# EAGLE board debug_backplane (EAGLE 8.2.2), part 1 of 4
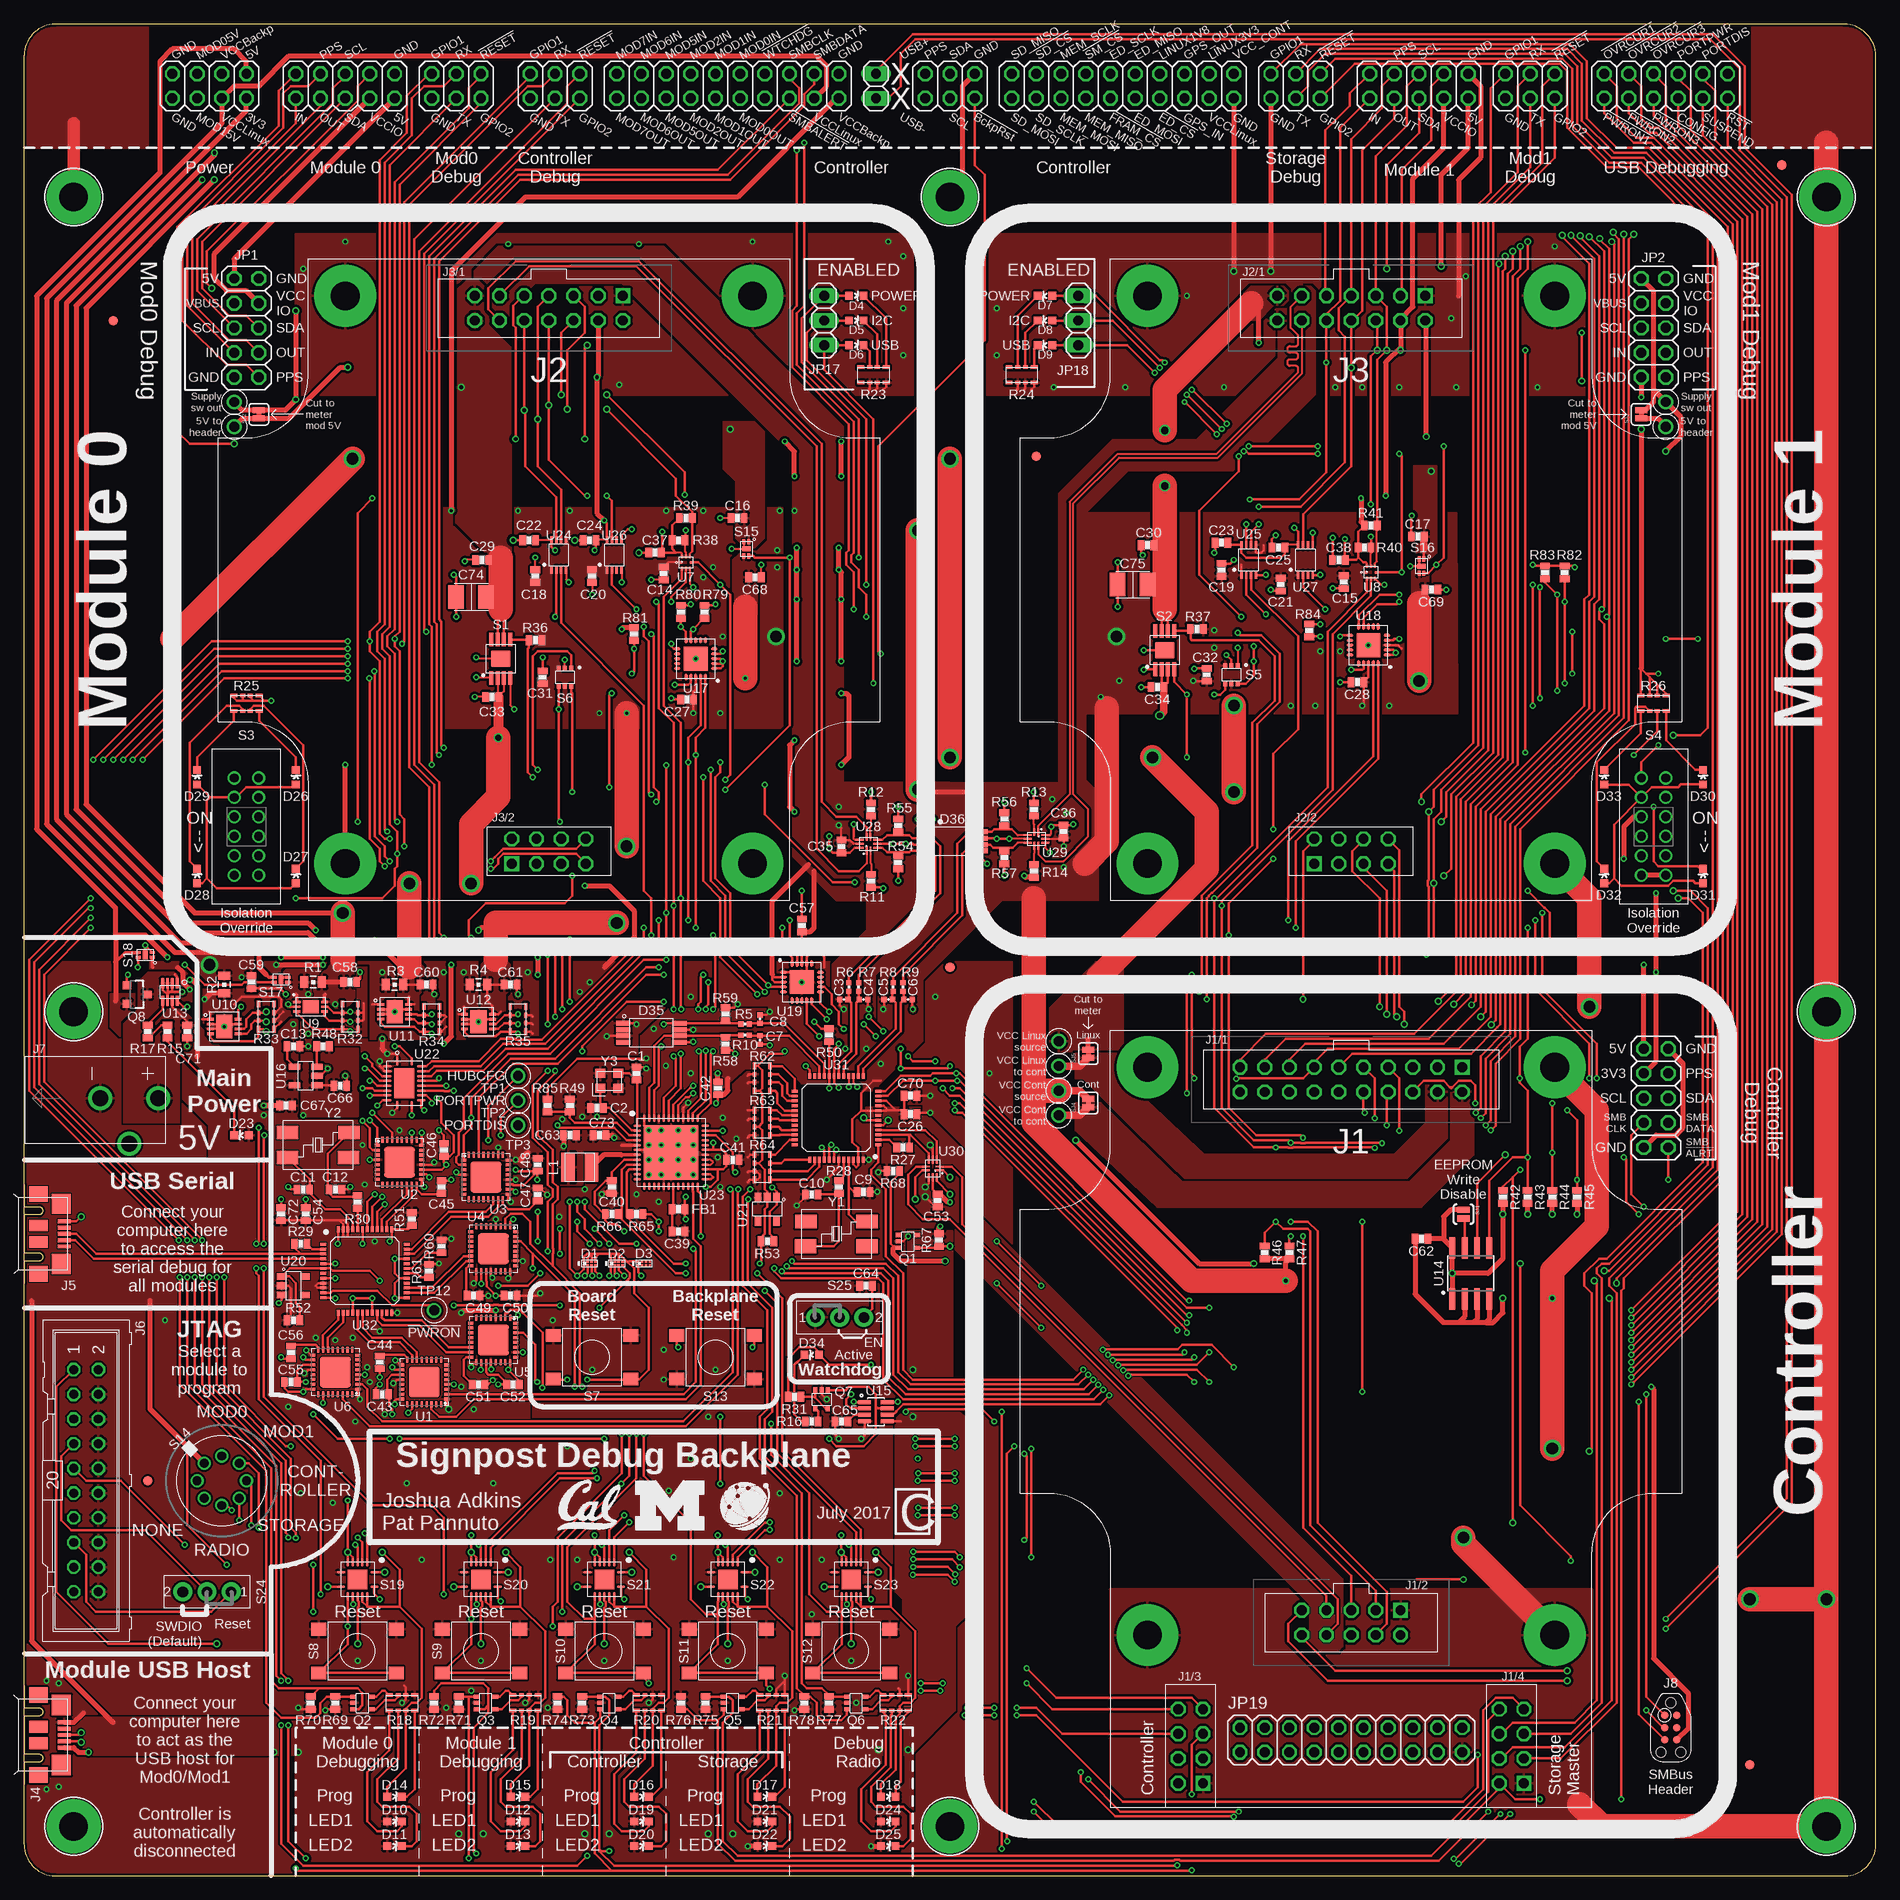
[diagram p0: board, top side]
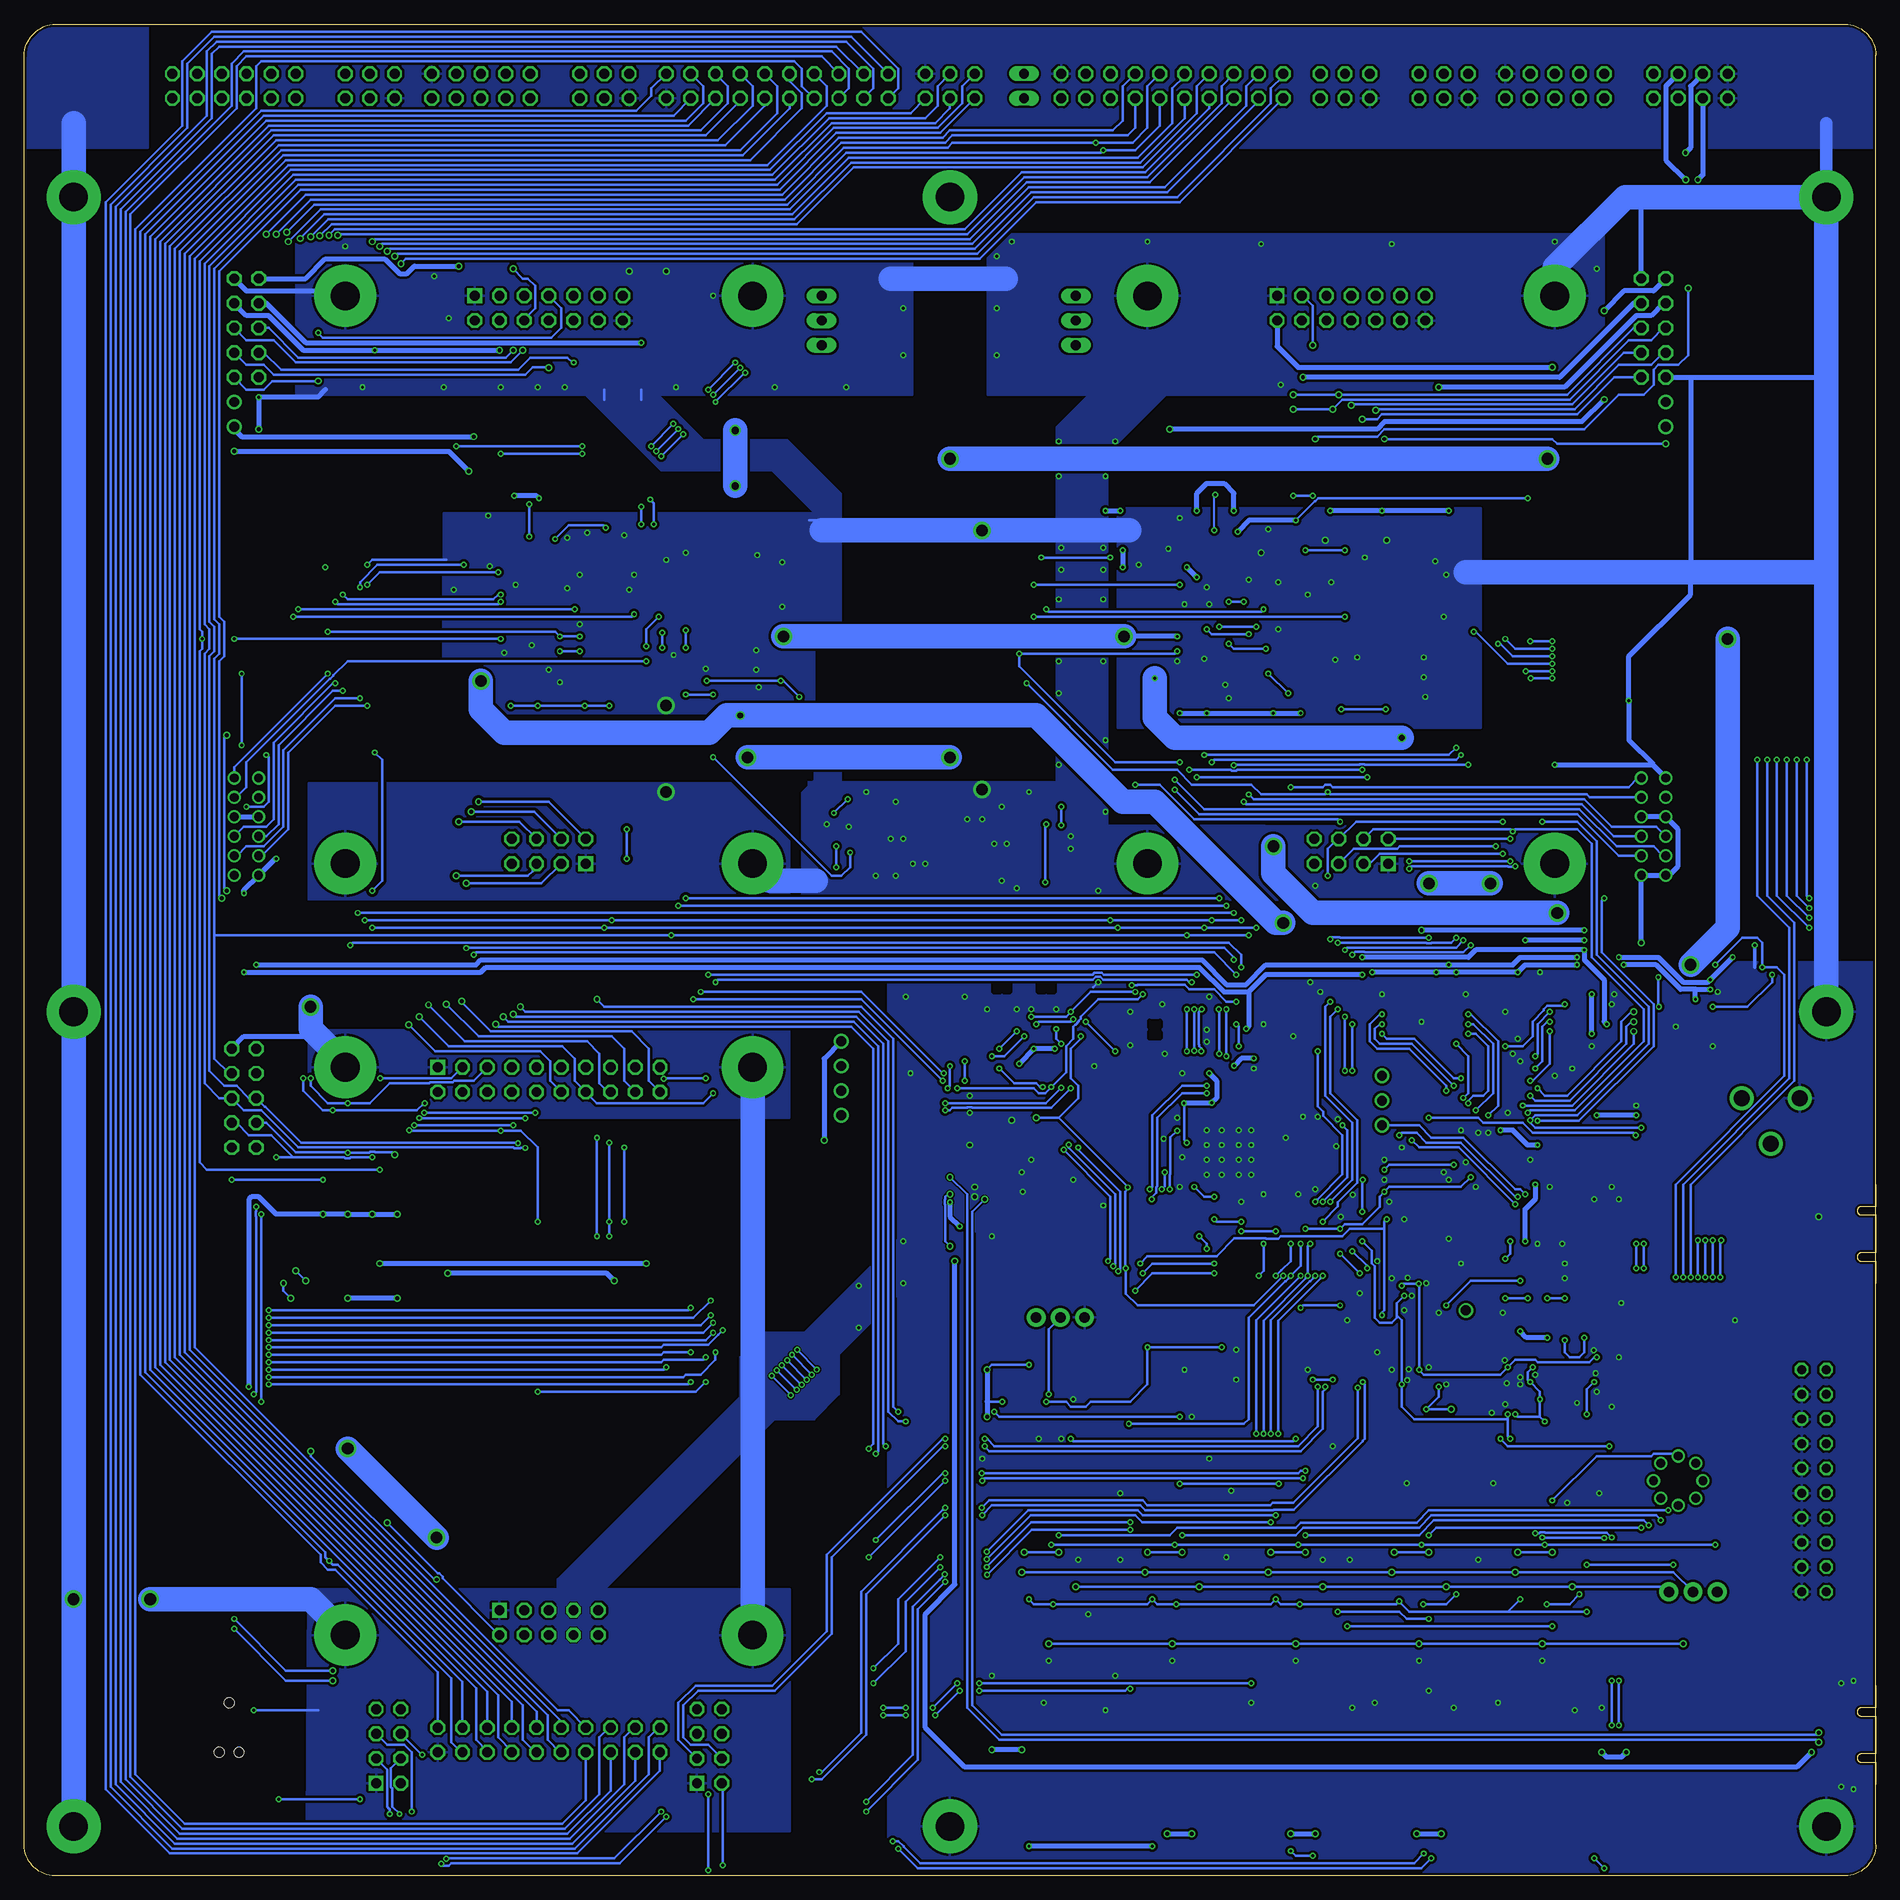
[diagram p1: board, bottom side, seen from below]

Size 190.5 x 190.5 mm. Coordinates in mm from the lower left corner, seen from the top.
Outline: 0,3.17 arc90 3.17,0 187.32,0 arc90 190.5,3.17 190.5,187.26 arc90 187.26,190.5 3.17,190.5 arc90 0,187.32 0,3.24
Copper layers (1*16): Top 0.035mm / dielectric 1.5mm / Bottom 0.035mm
Design rules "MF_Standard_2_Layer *": minimum track width 5mil, minimum drill 12mil, track to track 5mil, track to pad 5mil, pad to pad 5mil, via to via 5mil, smd to smd 0mil, copper to edge 10mil, drill to drill 10mil, minimum pad ring 6mil, minimum via ring 6mil, stop-mask expansion 2mil, vias tented up to drill 25mil, thermal gap 10mil
tRestrict: area 87.7,78.9 to 88,79; area 85.5,73.5 to 85.6,73.8; area 33,66.3 to 33.1,66.8

## Footprints (pad centres in the part's own frame; a part is rotated, then mirrored left to right if it is on the bottom)
0603_CAP = smd 0.7 x 1: 1 -0.65,0; 2 0.65,0
0402_CAP = smd 0.536 x 0.546: 1 -0.433,0; 2 0.433,0
1210_CAP = smd 2.4 x 1.6: 1 0,1.55; 2 0,-1.55
HMD8 = smd 0.25 x 0.3: 1A -0.6,-0.25; 1K -0.6,0.25; 2A -0.2,-0.25; 2K -0.2,0.25; 3A 0.2,-0.25; 3K 0.2,0.25; 4A 0.6,-0.25; 4K 0.6,0.25
LED-0603 = smd 0.8 x 0.8: A 0,-0.75; C 0,0.75
TSSOP-8 = smd 1.5 x 0.45: 1 -2.9,0.975; 2 -2.9,0.325; 3 -2.9,-0.325; 4 -2.9,-0.975; 5 2.9,-0.975; 6 2.9,-0.325; 7 2.9,0.325; 8 2.9,0.975
#4-PAD = drill 2.946 pad 5.563: B#4 0,0
BACKPLANE_MODULE_20PIN_10PIN_DEBUG = drill 1.016 square: 1 11.43,29.21; 21 5.08,-26.67; 100 -15.24,-44.45; 200 17.78,-44.45 | drill 1.016 octagon: 2 11.43,26.67; 3 8.89,29.21; 4 8.89,26.67; 5 6.35,29.21; 6 6.35,26.67; 7 3.81,29.21; 8 3.81,26.67; 9 1.27,29.21; 10 1.27,26.67; 11 -1.27,29.21; 12 -1.27,26.67; 13 -3.81,29.21; 14 -3.81,26.67; 15 -6.35,29.21; 16 -6.35,26.67; 17 -8.89,29.21; 18 -8.89,26.67; 19 -11.43,29.21; 20 -11.43,26.67; 22 5.08,-29.21; 23 2.54,-26.67; 24 2.54,-29.21; 25 0,-26.67; 26 0,-29.21; 27 -2.54,-26.67; 28 -2.54,-29.21; 29 -5.08,-26.67; 30 -5.08,-29.21; 101 -17.78,-44.45; 102 -15.24,-41.91; 103 -17.78,-41.91; 104 -15.24,-39.37; 105 -17.78,-39.37; 106 -15.24,-36.83; 107 -17.78,-36.83; 201 15.24,-44.45; 202 17.78,-41.91; 203 15.24,-41.91; 204 17.78,-39.37; 205 15.24,-39.37; 206 17.78,-36.83; 207 15.24,-36.83 | drill 2.946 pad 6.35: MNT1 -20.955,29.21; MNT2 20.955,29.21; MNT3 -20.955,-29.21; MNT4 20.955,-29.21
BACKPLANE_MODULE_14PIN_8PIN = drill 1.016 square: 1 7.62,29.21; 15 -3.81,-29.21 | drill 1.016 octagon: 2 7.62,26.67; 3 5.08,29.21; 4 5.08,26.67; 5 2.54,29.21; 6 2.54,26.67; 7 0,29.21; 8 0,26.67; 9 -2.54,29.21; 10 -2.54,26.67; 11 -5.08,29.21; 12 -5.08,26.67; 13 -7.62,29.21; 14 -7.62,26.67; 16 -3.81,-26.67; 17 -1.27,-29.21; 18 -1.27,-26.67; 19 1.27,-29.21; 20 1.27,-26.67; 21 3.81,-29.21; 22 3.81,-26.67 | drill 2.946 pad 6.35: MNT1 -20.955,29.21; MNT2 20.955,29.21; MNT3 20.955,-29.21; MNT4 -20.955,-29.21
USB_MICRO_B-HIROSE-ZX62R-B-5P = smd 0.4 x 1.35: 1 1.3,4.125; 2 0.65,4.125; 3 0,4.125; 4 -0.65,4.125; 5 -1.3,4.125 | smd 2.1 x 2: P$1 3.1,3.8; P$2 -3.1,3.8 | smd 1.6 x 1.9: P$3 -4.1,1.45; P$6 4.1,1.45 | smd 1.2 x 1.9: P$4 -0.85,1.45; P$5 0.85,1.45
ML20 = drill 0.914 octagon: 1 -11.43,-1.27; 2 -11.43,1.27; 3 -8.89,-1.27; 4 -8.89,1.27; 5 -6.35,-1.27; 6 -6.35,1.27; 7 -3.81,-1.27; 8 -3.81,1.27; 9 -1.27,-1.27; 10 -1.27,1.27; 11 1.27,-1.27; 12 1.27,1.27; 13 3.81,-1.27; 14 3.81,1.27; 15 6.35,-1.27; 16 6.35,1.27; 17 8.89,-1.27; 18 8.89,1.27; 19 11.43,-1.27; 20 11.43,1.27
PJ-102AH = drill 1.65: 1 0,-3; 2 0,3; 3 -4.7,0
TC2030-IDC-NL = smd 0.787 x 0.787: 1 -1.27,-0.635; 2 -1.27,0.635; 3 0,-0.635; 4 0,0.635; 5 1.27,-0.635; 6 1.27,0.635 | hole 1.016: -2.54,0; 2.54,-1.016; 2.54,1.016
2X05 = drill 1.016 octagon: 1 -5.08,-1.27; 2 -5.08,1.27; 3 -2.54,-1.27; 4 -2.54,1.27; 5 0,-1.27; 6 0,1.27; 7 2.54,-1.27; 8 2.54,1.27; 9 5.08,-1.27; 10 5.08,1.27
2X03 = drill 1.016 octagon: 1 -2.54,-1.27; 2 -2.54,1.27; 3 0,-1.27; 4 0,1.27; 5 2.54,-1.27; 6 2.54,1.27
2X10 = drill 1.016 octagon: 1 -11.43,-1.27; 2 -11.43,1.27; 3 -8.89,-1.27; 4 -8.89,1.27; 5 -6.35,-1.27; 6 -6.35,1.27; 7 -3.81,-1.27; 8 -3.81,1.27; 9 -1.27,-1.27; 10 -1.27,1.27; 11 1.27,-1.27; 12 1.27,1.27; 13 3.81,-1.27; 14 3.81,1.27; 15 6.35,-1.27; 16 6.35,1.27; 17 8.89,-1.27; 18 8.89,1.27; 19 11.43,-1.27; 20 11.43,1.27
1X02 = drill 1.016 long: 1 -1.27,0; 2 1.27,0
FIDUCIAL-1X2 = smd 1 x 1: 1 0,0
2X04 = drill 1.016 octagon: 1 -3.81,-1.27; 2 -3.81,1.27; 3 -1.27,-1.27; 4 -1.27,1.27; 5 1.27,-1.27; 6 1.27,1.27; 7 3.81,-1.27; 8 3.81,1.27
1X03 = drill 1.016 long: 1 -2.54,0; 2 0,0; 3 2.54,0
1212 = smd 1.4 x 3: P$1 -1.2,0; P$2 1.2,0
SOT353 = smd 0.42 x 0.6: D1 0.65,-0.95; D2 -0.65,-0.95; G1 0.65,0.95; G2 -0.65,0.95; S 0,0.95
SOT23-3 = smd 0.8 x 0.9: 1 -0.95,-1; 2 0.95,-1; 3 0,1.1
0805_RES = smd 0.8 x 1.2: 1 -0.9,0; 2 0.9,0
0402_RES-HIGH_SPEED = smd 0.536 x 0.546: 1 -0.433,0; 2 0.433,0
0603-RES = smd 0.7 x 1: 1 -0.65,0; 2 0.65,0
ARRAY-CONVEX-0603-4 = smd 0.7 x 0.35: A1 -1.3,0.8; A2 -1.3,-0.8; D1 1.3,0.8; D2 1.3,-0.8 | smd 0.5 x 0.35: B1 -0.4,0.8; B2 -0.4,-0.8; C1 0.4,0.8; C2 0.4,-0.8
MSOP-8EP = smd 0.45 x 1.35: 1 -0.975,-1.975; 2 -0.325,-1.975; 3 0.325,-1.975; 4 0.975,-1.975; 5 0.975,1.975; 6 0.325,1.975; 7 -0.325,1.975; 8 -0.975,1.975 | smd 2 x 1.7: PAD 0,0
MMS42 = drill 0.9: A1 -1.25,5; A2 1.25,5; A3 -1.25,-1; A4 1.25,-1; B1 -1.25,1; B2 1.25,1; B3 -1.25,-5; B4 1.25,-5; COM1 -1.25,3; COM2 1.25,3; COM3 -1.25,-3; COM4 1.25,-3
SC70-6 = smd 0.4 x 0.5: 1 -0.65,-0.95; 2 0,-0.95; 3 0.65,-0.95; 4 0.65,0.95; 5 0,0.95; 6 -0.65,0.95
PTS645 = smd 1.55 x 1.3: 1 -3.975,2.25; 2 3.975,2.25; 3 3.975,-2.25; 4 -3.975,-2.25
RM-SWITCH = drill 0.9: 1 1.796,1.796; 2 2.54,0; 3 1.796,-1.796; 4 0,-2.54; 5 -1.796,-1.796; 6 -2.54,0; 7 -1.796,1.796; C 0,2.54
TDFN4 = smd 0.3 x 0.55: 1 -0.25,-0.725; 2 0.25,-0.725; 3 0.25,0.725; 4 -0.25,0.725 | smd 0.86 x 0.5: PAD 0,0
S-PVQFN-N14-3.5MM = smd 0.85 x 0.28: 1 -1.725,-0.75; 7 1.725,-0.75; 8 1.725,0.75; 14 -1.725,0.75 | smd 0.28 x 0.85: 2 -1,-1.725; 3 -0.5,-1.725; 4 0,-1.725; 5 0.5,-1.725; 6 1,-1.725; 9 1,1.725; 10 0.5,1.725; 11 0,1.725; 12 -0.5,1.725; 13 -1,1.725 | smd 2 x 2: PAD 0,0
TE_SSA12/SPDT = drill 1.092 pad 1.93: 1 -2.489,0; 2 2.489,0; IN 0,0
SJ_2S-NO = smd 0.635 x 1.27: 1 -0.45,0; 2 0.45,0
SJ_2S = smd 0.635 x 1.27: 1 -0.412,0; 2 0.412,0
TESTPOINT_0.040IN = drill 1.016: TESTPOINT 0,0
QFN32 = smd 0.6 x 0.3: 1 -2.3,1.75; 2 -2.3,1.25; 3 -2.3,0.75; 4 -2.3,0.25; 5 -2.3,-0.25; 6 -2.3,-0.75; 7 -2.3,-1.25; 8 -2.3,-1.75; 17 2.3,-1.75; 18 2.3,-1.25; 19 2.3,-0.75; 20 2.3,-0.25; 21 2.3,0.25; 22 2.3,0.75; 23 2.3,1.25; 24 2.3,1.75 | smd 0.3 x 0.6: 9 -1.75,-2.3; 10 -1.25,-2.3; 11 -0.75,-2.3; 12 -0.25,-2.3; 13 0.25,-2.3; 14 0.75,-2.3; 15 1.25,-2.3; 16 1.75,-2.3; 25 1.75,2.3; 26 1.25,2.3; 27 0.75,2.3; 28 0.25,2.3; 29 -0.25,2.3; 30 -0.75,2.3; 31 -1.25,2.3; 32 -1.75,2.3 | smd 3.2 x 3.2: EXP 0,0
UMLP-8 = smd 0.35 x 0.25: 1 -0.55,0; 5 0.55,0 | smd 0.24 x 0.35: 2 -0.4,-0.625; 3 0,-0.625; 4 0.4,-0.625; 6 0.4,0.625; 7 0,0.625; 8 -0.4,0.625
DFN-6-2MMX3MM = smd 0.25 x 0.7: 1 -0.5,-1.425; 2 0,-1.425; 3 0.5,-1.425; 4 0.5,1.425; 5 0,1.425; 6 -0.5,1.425 | smd 1.35 x 1.65: NC 0,0
DFN-8 = smd 0.28 x 0.675: P1 -0.75,-1.42; P2 -0.25,-1.42; P3 0.25,-1.42; P4 0.75,-1.42; P5 0.75,1.42; P6 0.25,1.42; P7 -0.25,1.42; P8 -0.75,1.42 | smd 2.38 x 1.65: P$1 0,0
SC70-8 = smd 0.3 x 1: 1 -0.75,-0.9; 2 -0.25,-0.9; 3 0.25,-0.9; 4 0.75,-0.9; 5 0.75,0.9; 6 0.25,0.9; 7 -0.25,0.9; 8 -0.75,0.9
SOIC-8 = smd 0.61 x 2.21: 1 -1.905,-2.616; 2 -0.635,-2.616; 3 0.635,-2.616; 4 1.905,-2.616; 5 1.905,2.616; 6 0.635,2.616; 7 -0.635,2.616; 8 -1.905,2.616
SOT-23-8 = smd 0.42 x 1.3: 1 -0.975,-1.17; 2 -0.325,-1.17; 3 0.325,-1.17; 4 0.975,-1.17; 5 0.975,1.17; 6 0.325,1.17; 7 -0.325,1.17; 8 -0.975,1.17
SOT-23-5 = smd 0.6 x 1.2: 1 -0.95,-1.15; 2 0,-1.15; 3 0.95,-1.15; 4 0.95,1.15; 5 -0.95,1.15
QFN-20-4MM = smd 0.7 x 0.3: 1 -1.9,1; 2 -1.9,0.5; 3 -1.9,0; 4 -1.9,-0.5; 5 -1.9,-1; 11 1.9,-1; 12 1.9,-0.5; 13 1.9,0; 14 1.9,0.5; 15 1.9,1 | smd 0.3 x 0.7: 6 -1,-1.9; 7 -0.5,-1.9; 8 0,-1.9; 9 0.5,-1.9; 10 1,-1.9; 16 1,1.9; 17 0.5,1.9; 18 0,1.9; 19 -0.5,1.9; 20 -1,1.9 | smd 2.45 x 2.45: GND 0,0
SOT23-5 = smd 0.7 x 1: 1 0.95,1.2; 2 0,1.2; 3 -0.95,1.2; 4 -0.95,-1.2; 5 0.95,-1.2
QFN-N20 = smd 0.85 x 0.28: 1 -2.23,-0.75; 10 2.23,-0.75; 11 2.23,0.75; 20 -2.23,0.75 | smd 0.28 x 0.85: 2 -1.75,-1.73; 3 -1.25,-1.73; 4 -0.75,-1.73; 5 -0.25,-1.73; 6 0.25,-1.73; 7 0.75,-1.73; 8 1.25,-1.73; 9 1.75,-1.73; 12 1.75,1.73; 13 1.25,1.73; 14 0.75,1.73; 15 0.25,1.73; 16 -0.25,1.73; 17 -0.75,1.73; 18 -1.25,1.73; 19 -1.75,1.73 | smd 3.05 x 2.05: P$22 0,0
QFN-48-7MM = smd 0.8 x 0.28: 1 -3.5,2.75; 2 -3.5,2.25; 3 -3.5,1.75; 4 -3.5,1.25; 5 -3.5,0.75; 6 -3.5,0.25; 7 -3.5,-0.25; 8 -3.5,-0.75; 9 -3.5,-1.25; 10 -3.5,-1.75; 11 -3.5,-2.25; 12 -3.5,-2.75; 25 3.5,-2.75; 26 3.5,-2.25; 27 3.5,-1.75; 28 3.5,-1.25; 29 3.5,-0.75; 30 3.5,-0.25; 31 3.5,0.25; 32 3.5,0.75; 33 3.5,1.25; 34 3.5,1.75; 35 3.5,2.25; 36 3.5,2.75 | smd 0.28 x 0.8: 13 -2.75,-3.5; 14 -2.25,-3.5; 15 -1.75,-3.5; 16 -1.25,-3.5; 17 -0.75,-3.5; 18 -0.25,-3.5; 19 0.25,-3.5; 20 0.75,-3.5; 21 1.25,-3.5; 22 1.75,-3.5; 23 2.25,-3.5; 24 2.75,-3.5; 37 2.75,3.5; 38 2.25,3.5; 39 1.75,3.5; 40 1.25,3.5; 41 0.75,3.5; 42 0.25,3.5; 43 -0.25,3.5; 44 -0.75,3.5; 45 -1.25,3.5; 46 -1.75,3.5; 47 -2.25,3.5; 48 -2.75,3.5 | smd 5.6 x 5.6: THERMAL 0,0
VFSOP-8 = smd 0.25 x 0.75: 1 -0.75,-1.55; 2 -0.25,-1.55; 3 0.25,-1.55; 4 0.75,-1.55; 5 0.75,1.55; 6 0.25,1.55; 7 -0.25,1.55; 8 -0.75,1.55
UQFN-10 = smd 0.2 x 0.9: 1 -0.2,-0.65 | smd 0.2 x 0.8: 2 0.2,-0.7; 6 0.2,0.7; 7 -0.2,0.7 | smd 0.8 x 0.2: 3 0.9,-0.4; 4 0.9,0; 5 0.9,0.4; 8 -0.9,0.4; 9 -0.9,0; 10 -0.9,-0.4
LQFP-48 = smd 0.3 x 0.6: 1 -2.75,-4.3; 2 -2.25,-4.3; 3 -1.75,-4.3; 4 -1.25,-4.3; 5 -0.75,-4.3; 6 -0.25,-4.3; 7 0.25,-4.3; 8 0.75,-4.3; 9 1.25,-4.3; 10 1.75,-4.3; 11 2.25,-4.3; 12 2.75,-4.3; 25 2.75,4.3; 26 2.25,4.3; 27 1.75,4.3; 28 1.25,4.3; 29 0.75,4.3; 30 0.25,4.3; 31 -0.25,4.3; 32 -0.75,4.3; 33 -1.25,4.3; 34 -1.75,4.3; 35 -2.25,4.3; 36 -2.75,4.3 | smd 0.6 x 0.3: 13 4.3,-2.75; 14 4.3,-2.25; 15 4.3,-1.75; 16 4.3,-1.25; 17 4.3,-0.75; 18 4.3,-0.25; 19 4.3,0.25; 20 4.3,0.75; 21 4.3,1.25; 22 4.3,1.75; 23 4.3,2.25; 24 4.3,2.75; 37 -4.3,2.75; 38 -4.3,2.25; 39 -4.3,1.75; 40 -4.3,1.25; 41 -4.3,0.75; 42 -4.3,0.25; 43 -4.3,-0.25; 44 -4.3,-0.75; 45 -4.3,-1.25; 46 -4.3,-1.75; 47 -4.3,-2.25; 48 -4.3,-2.75
ABMM = smd 2.21 x 1.397: 1 -3.167,-1.27; 3 3.15,1.27; NC1 -3.15,1.27; NC2 3.15,-1.27
FHXXX = smd 1 x 0.95: 1 -0.925,-0.775; 2 0.925,-0.775; 3 0.925,0.775; 4 -0.925,0.775

## Placement (x,y rotation side)
C1  8pF  [0603_CAP]  62.99,82.55 90 top
C2  8pF  [0603_CAP]  58.93,78.99 180 top
C3  22pF  [0402_CAP]  84.33,90.17 180 top
C4  22pF  [0402_CAP]  86.36,90.17 0 top
C5  22pF  [0402_CAP]  88.9,90.17 180 top
C6  22pF  [0402_CAP]  90.93,90.17 0 top
C7  22pF  [0402_CAP]  75.69,85.98 270 top
C8  22pF  [0402_CAP]  75.69,88.14 90 top
C9  22pF  [0603_CAP]  86.36,70.36 180 top
C10  22pF  [0603_CAP]  81.03,70.1 0 top
C11  22pF  [0603_CAP]  28.7,70.61 0 top
C12  22pF  [0603_CAP]  32,70.61 180 top
C13  0.01uF  [0603_CAP]  27.69,85.34 0 top
C14  0.1uF  [0603_CAP]  65.79,133.99 270 top
C15  0.1uF  [0603_CAP]  135.76,133.1 270 top
C16  0.1uF  [0603_CAP]  73.41,139.7 180 top
C17  0.1uF  [0603_CAP]  143.38,137.79 180 top
C18  0.1uF  [0603_CAP]  52.58,133.73 90 top
C19  0.1uF  [0603_CAP]  123.19,134.37 90 top
C20  0.1uF  [0603_CAP]  58.42,133.73 270 top
C21  0.1uF  [0603_CAP]  129.29,132.84 270 top
C22  0.1uF  [0603_CAP]  51.94,137.41 180 top
C23  0.1uF  [0603_CAP]  123.19,137.16 180 top
C24  0.1uF  [0603_CAP]  58.17,137.41 180 top
C25  0.1uF  [0603_CAP]  129.03,136.65 180 top
C26  0.1uF  [0603_CAP]  91.19,78.36 180 top
C27  0.1uF  [0603_CAP]  68.2,121.03 180 top
C28  0.1uF  [0603_CAP]  137.16,122.81 180 top
C29  0.1uF  [0603_CAP]  47.12,135.38 180 top
C30  0.1uF  [0603_CAP]  115.57,136.91 180 top
C31  0.1uF  [0603_CAP]  53.34,123.32 90 top
C32  0.1uF  [0603_CAP]  121.67,123.57 90 top
C33  0.1uF  [0603_CAP]  48.13,121.28 180 top
C34  0.1uF  [0603_CAP]  116.59,122.3 180 top
C35  0.1uF  [0603_CAP]  84.07,105.92 90 top
C36  0.1uF  [0603_CAP]  106.93,107.44 270 top
C37  0.1uF  [0603_CAP]  64.9,136.14 180 top
C38  0.1uF  [0603_CAP]  135.25,135.38 180 top
C39  0.1uF  [0603_CAP]  67.31,66.29 0 top
C40  0.1uF  [0603_CAP]  60.45,70.87 270 top
C41  0.1uF  [0603_CAP]  72.9,73.66 0 top
C42  0.1uF  [0603_CAP]  71.37,81.03 90 top
C43  0.1uF  [0603_CAP]  36.83,49.53 180 top
C44  0.1uF  [0603_CAP]  36.58,52.83 270 top
C45  0.1uF  [0603_CAP]  42.93,70.87 90 top
C46  0.1uF  [0603_CAP]  43.18,74.68 90 top
C47  0.1uF  [0603_CAP]  52.83,70.1 90 top
C48  0.1uF  [0603_CAP]  52.83,73.15 90 top
C49  0.1uF  [0603_CAP]  46.23,59.69 0 top
C50  0.1uF  [0603_CAP]  50.04,59.69 0 top
C51  0.1uF  [0603_CAP]  46.74,50.55 0 top
C52  0.1uF  [0603_CAP]  50.29,50.55 0 top
C53  0.1uF  [0603_CAP]  93.98,69.47 90 top
C54  0.1uF  [0603_CAP]  28.96,68.07 270 top
C55  0.1uF  [0603_CAP]  27.43,50.8 180 top
C56  0.1uF  [0603_CAP]  27.43,53.85 270 top
C57  0.1uF  [0603_CAP]  80.01,97.79 90 top
C58  0.1uF  [0603_CAP]  33.53,91.95 0 top
C59  0.1uF  [0603_CAP]  23.37,91.95 270 top
C60  0.1uF  [0603_CAP]  41.4,91.69 0 top
C61  0.1uF  [0603_CAP]  50.04,91.69 0 top
C62  0.1uF  [0603_CAP]  143.76,65.53 180 top
C63  0.1uF  [0603_CAP]  56.13,76.2 180 top
C64  0.47uF  [0603_CAP]  86.61,60.71 180 top
C65  0.82uF  [0603_CAP]  84.07,46.74 180 top
C66  2.2uF  [0603_CAP]  32.51,81.28 0 top
C67  2.2uF  [0603_CAP]  26.92,79.25 180 top
C68  4.7uF  [0603_CAP]  75.18,133.6 0 top
C69  4.7uF  [0603_CAP]  144.78,132.33 0 top
C70  4.7uF  [0603_CAP]  91.19,80.26 180 top
C71  4.7uF  [0603_CAP]  16.76,86.87 270 top
C72  4.7uF  [0603_CAP]  26.42,68.07 270 top
C73  6.8uF  [0603_CAP]  59.18,76.2 0 top
C74  150uF  [1210_CAP]  45.97,131.57 270 top
C75  150uF  [1210_CAP]  114.05,132.84 270 top
D1  DIODE_SCHOTTKY_ARRAY-4HMD8  [HMD8]  58.17,62.99 0 top
D2  DIODE_SCHOTTKY_ARRAY-4HMD8  [HMD8]  60.96,62.99 0 top
D3  DIODE_SCHOTTKY_ARRAY-4HMD8  [HMD8]  63.75,62.99 0 top
D4  LED0603  [LED-0603]  85.6,162.56 270 top
D5  LED0603  [LED-0603]  85.6,160.02 270 top
D6  LED0603  [LED-0603]  85.6,157.48 270 top
D7  LED0603  [LED-0603]  105.03,162.56 90 top
D8  LED0603  [LED-0603]  105.03,160.02 90 top
D9  LED0603  [LED-0603]  105.03,157.48 90 top
D10  LED0603  [LED-0603]  38.1,5.59 270 top
D11  LED0603  [LED-0603]  38.1,3.05 270 top
D12  LED0603  [LED-0603]  50.8,5.59 270 top
D13  LED0603  [LED-0603]  50.8,3.05 270 top
D14  LED0603  [LED-0603]  38.1,8.13 270 top
D15  LED0603  [LED-0603]  50.8,8.13 270 top
D16  LED0603  [LED-0603]  63.5,8.13 270 top
D17  LED0603  [LED-0603]  76.2,8.13 270 top
D18  LED0603  [LED-0603]  88.9,8.13 270 top
D19  LED0603  [LED-0603]  63.5,5.59 270 top
D20  LED0603  [LED-0603]  63.5,3.05 270 top
D21  LED0603  [LED-0603]  76.2,5.59 270 top
D22  LED0603  [LED-0603]  76.2,3.05 270 top
D23  LED0603  [LED-0603]  22.35,76.2 90 top
D24  LED0603  [LED-0603]  88.9,5.59 270 top
D25  LED0603  [LED-0603]  88.9,3.05 270 top
D26  LED0603  [LED-0603]  27.94,113.03 0 top
D27  LED0603  [LED-0603]  27.94,102.87 0 top
D28  LED0603  [LED-0603]  17.78,102.87 0 top
D29  LED0603  [LED-0603]  17.78,113.03 0 top
D30  LED0603  [LED-0603]  172.72,113.03 0 top
D31  LED0603  [LED-0603]  172.72,102.87 0 top
D32  LED0603  [LED-0603]  162.56,102.87 0 top
D33  LED0603  [LED-0603]  162.56,113.03 0 top
D34  LED0603  [LED-0603]  81.03,53.59 90 top
D35  SN75240-TSSOP  [TSSOP-8]  64.52,86.74 0 top
D36  SN75240-TSSOP  [TSSOP-8]  95.5,106.43 0 top
FB1  1.5kR  [0603_CAP]  67.31,68.58 0 top
H1  MOUNT-PAD-ROUND#4  [#4-PAD]  5.08,172.72 0 top
H2  MOUNT-PAD-ROUND#4  [#4-PAD]  95.25,172.72 0 top
H3  MOUNT-PAD-ROUND#4  [#4-PAD]  185.42,172.72 0 top
H4  MOUNT-PAD-ROUND#4  [#4-PAD]  5.08,88.9 0 top
H5  MOUNT-PAD-ROUND#4  [#4-PAD]  185.42,88.9 0 top
H6  MOUNT-PAD-ROUND#4  [#4-PAD]  5.08,5.08 0 top
H7  MOUNT-PAD-ROUND#4  [#4-PAD]  95.25,5.08 0 top
H8  MOUNT-PAD-ROUND#4  [#4-PAD]  185.42,5.08 0 top
J1  BACKPLANE_CONTROLLER_MODULE_DEBUG  [BACKPLANE_MODULE_20PIN_10PIN_DEBUG]  136.53,53.98 0 top
J2  BACKPLANE_GENERIC_MODULE_DEBUG  [BACKPLANE_MODULE_14PIN_8PIN]  53.98,133.35 0 top
J3  BACKPLANE_GENERIC_MODULE_DEBUG  [BACKPLANE_MODULE_14PIN_8PIN]  136.53,133.35 0 top
J4  MICRO_USB_B_HIROSE_ZX62R-B-5P  [USB_MICRO_B-HIROSE-ZX62R-B-5P]  0,14.48 270 top
J5  MICRO_USB_B_HIROSE_ZX62R-B-5P  [USB_MICRO_B-HIROSE-ZX62R-B-5P]  0,66.04 270 top
J6  [ML20]  6.35,40.64 270 top
J7  PJ-102AH  [PJ-102AH]  10.79,80.01 90 top
J8  TC2030-FTDI-I2C  [TC2030-IDC-NL]  169.42,15.24 270 top
JP1  [2X05]  22.86,159.26 270 top
JP2  [2X05]  167.64,159.26 270 top
JP3  [2X03]  44.45,184.15 180 top
JP4  [2X05]  33.02,184.15 180 top
JP5  [2X05]  143.51,184.15 180 top
JP6  [2X03]  154.94,184.15 180 top
JP7  [2X03]  172.72,184.15 0 top
JP8  [2X03]  165.1,184.15 0 top
JP9  [2X03]  54.61,184.15 180 top
JP10  [2X03]  130.81,184.15 180 top
JP11  [2X05]  167.89,80.01 270 top
JP12  [2X10]  72.39,184.15 180 top
JP13  [1X02]  87.63,184.15 270 top
JP14  [2X03]  95.25,184.15 180 top
JP15  FIDUCIAL1X2  [FIDUCIAL-1X2]  177.55,11.43 0 top
JP16  [2X04]  19.05,184.15 180 top
JP17  [1X03]  82.3,160.02 90 top
JP18  [1X03]  108.46,160.02 90 top
JP19  [2X10]  136.53,13.97 0 top
JP20  [2X10]  113.03,184.15 0 top
JP21  FIDUCIAL1X2  [FIDUCIAL-1X2]  95.25,93.47 0 top
JP22  FIDUCIAL1X2  [FIDUCIAL-1X2]  12.7,40.64 0 top
JP23  FIDUCIAL1X2  [FIDUCIAL-1X2]  9.14,160.02 0 top
JP24  FIDUCIAL1X2  [FIDUCIAL-1X2]  180.85,176.02 0 top
JP25  FIDUCIAL1X2  [FIDUCIAL-1X2]  104.14,146.05 0 top
L1  22uH  [1212]  57.15,72.9 180 top
Q1  DMN32D2LDF  [SOT353]  90.93,65.28 90 top
Q2  DMN32D2LDF  [SOT353]  34.8,17.78 90 top
Q3  DMN32D2LDF  [SOT353]  47.5,17.78 90 top
Q4  DMN32D2LDF  [SOT353]  60.2,17.78 90 top
Q5  DMN32D2LDF  [SOT353]  72.9,17.78 90 top
Q6  DMN32D2LDF  [SOT353]  85.6,17.78 90 top
Q7  DMN32D2LDF  [SOT353]  82.04,49.02 0 top
Q8  MOSFET-NCHANNELSMD  [SOT23-3]  11.56,90.68 270 top
R1  0.017Ω  [0805_RES]  29.72,91.95 180 top
R2  0.017Ω  [0805_RES]  20.57,91.69 270 top
R3  0.017Ω  [0805_RES]  38.1,91.69 180 top
R4  0.017Ω  [0805_RES]  46.74,91.69 180 top
R5  27Ω  [0402_RES-HIGH_SPEED]  74.17,87.63 0 top
R6  27Ω  [0402_RES-HIGH_SPEED]  84.84,91.44 270 top
R7  27Ω  [0402_RES-HIGH_SPEED]  85.85,91.44 270 top
R8  27Ω  [0402_RES-HIGH_SPEED]  89.41,91.44 270 top
R9  27Ω  [0402_RES-HIGH_SPEED]  90.42,91.44 270 top
R10  27Ω  [0402_RES-HIGH_SPEED]  74.17,86.49 0 top
R11  50Ω  [0603-RES]  87.12,102.36 270 top
R12  50Ω  [0603-RES]  87.12,109.73 90 top
R13  50Ω  [0603-RES]  103.89,109.73 90 top
R14  50Ω  [0603-RES]  103.89,103.38 270 top
R15  50Ω  [0603-RES]  14.73,86.87 270 top
R16  50Ω  [0603-RES]  81.03,46.74 180 top
R17  50Ω  [0603-RES]  12.7,86.87 270 top
R18  1kΩ  [ARRAY-CONVEX-0603-4]  38.86,17.78 0 top
R19  1kΩ  [ARRAY-CONVEX-0603-4]  51.56,17.78 0 top
R20  1kΩ  [ARRAY-CONVEX-0603-4]  64.26,17.78 0 top
R21  1kΩ  [ARRAY-CONVEX-0603-4]  76.96,17.78 0 top
R22  1kΩ  [ARRAY-CONVEX-0603-4]  89.66,17.78 0 top
R23  1kΩ  [ARRAY-CONVEX-0603-4]  87.38,154.43 180 top
R24  1kΩ  [ARRAY-CONVEX-0603-4]  102.62,154.43 180 top
R25  1kΩ  [ARRAY-CONVEX-0603-4]  22.86,120.65 180 top
R26  1kΩ  [ARRAY-CONVEX-0603-4]  167.64,120.65 180 top
R27  1.5kΩ  [0603-RES]  90.42,74.93 180 top
R28  1.5kΩ  [0603-RES]  83.82,70.87 90 top
R29  1.5kΩ  [0603-RES]  28.45,65.02 0 top
R30  1.5kΩ  [0603-RES]  34.29,69.34 270 top
R31  1.5kΩ  [0603-RES]  79.25,49.28 180 top
R32  1.8kΩ  [ARRAY-CONVEX-0603-4]  33.53,88.39 90 top
R33  1.8kΩ  [ARRAY-CONVEX-0603-4]  24.89,88.39 90 top
R34  1.8kΩ  [ARRAY-CONVEX-0603-4]  41.91,88.14 90 top
R35  1.8kΩ  [ARRAY-CONVEX-0603-4]  50.8,88.14 90 top
R36  10kΩ  [0603-RES]  52.58,127.13 0 top
R37  10kΩ  [0603-RES]  120.65,128.27 0 top
R38  10kΩ  [0603-RES]  67.31,137.41 0 top
R39  10kΩ  [0603-RES]  68.07,139.7 0 top
R40  10kΩ  [0603-RES]  137.92,136.65 0 top
R41  10kΩ  [0603-RES]  138.56,138.94 0 top
R42  10kΩ  [0603-RES]  152.15,69.85 270 top
R43  10kΩ  [0603-RES]  154.69,69.85 270 top
R44  10kΩ  [0603-RES]  157.23,69.85 270 top
R45  10kΩ  [0603-RES]  159.77,69.85 270 top
R46  10kΩ  [0603-RES]  127.64,64.14 270 top
R47  10kΩ  [0603-RES]  130.18,64.14 270 top
R48  10kΩ  [0603-RES]  30.73,85.34 0 top
R49  10kΩ  [0603-RES]  56.13,79.25 270 top
R50  10kΩ  [0603-RES]  82.8,86.49 90 top
R51  10kΩ  [0603-RES]  39.88,67.56 90 top
R52  10kΩ  [0603-RES]  27.69,57.15 180 top
R53  10kΩ  [0603-RES]  76.45,65.28 180 top
R54  15kΩ  [0603-RES]  89.92,104.27 90 top
R55  15kΩ  [0603-RES]  89.92,108.08 270 top
R56  15kΩ  [0603-RES]  100.84,108.71 270 top
R57  15kΩ  [0603-RES]  100.84,104.78 90 top
R58  15kΩ  [0603-RES]  72.14,85.6 90 top
R59  15kΩ  [0603-RES]  72.14,88.65 270 top
R60  15kΩ  [0603-RES]  42.93,64.77 90 top
R61  15kΩ  [0603-RES]  41.66,62.23 90 top
R62  15kΩ  [ARRAY-CONVEX-0603-4]  75.95,82.04 270 top
R63  15kΩ  [ARRAY-CONVEX-0603-4]  75.95,77.47 270 top
R64  15kΩ  [ARRAY-CONVEX-0603-4]  75.95,72.9 270 top
R65  100kΩ  [0603-RES]  62.99,68.07 0 top
R66  100kΩ  [0603-RES]  60.45,68.07 180 top
R67  100kΩ  [0603-RES]  94.11,65.41 90 top
R68  100kΩ  [0603-RES]  89.41,72.52 0 top
R69  1MΩ  [0603-RES]  32,17.78 90 top
R70  1MΩ  [0603-RES]  29.46,17.78 90 top
R71  1MΩ  [0603-RES]  44.7,17.78 90 top
R72  1MΩ  [0603-RES]  42.16,17.78 90 top
R73  1MΩ  [0603-RES]  57.4,17.78 90 top
R74  1MΩ  [0603-RES]  54.86,17.78 90 top
R75  1MΩ  [0603-RES]  70.1,17.78 90 top
R76  1MΩ  [0603-RES]  67.56,17.78 270 top
R77  1MΩ  [0603-RES]  82.8,17.78 90 top
R78  1MΩ  [0603-RES]  80.26,17.78 90 top
R79  10MΩ  [0603-RES]  69.98,130.05 270 top
R80  10MΩ  [0603-RES]  67.56,130.05 270 top
R81  10MΩ  [0603-RES]  62.74,127.76 270 top
R82  10MΩ  [0603-RES]  158.5,134.11 270 top
R83  10MΩ  [0603-RES]  156.46,134.11 270 top
R84  10MΩ  [0603-RES]  132.21,128.14 270 top
R85  DNP  [0603-RES]  53.85,79.25 90 top
S1  AP2401MP  [MSOP-8EP]  49.02,125.22 0 top
S2  AP2401MP  [MSOP-8EP]  117.35,126.11 0 top
S3  MMS42  [MMS42]  22.86,107.95 0 top
S4  MMS42  [MMS42]  167.64,107.95 0 top
S5  NC7SZ157  [SC70-6]  124.21,123.57 180 top
S6  NC7SZ157  [SC70-6]  55.63,123.32 180 top
S7  PTS645SM43SMTR92  [PTS645]  58.42,53.34 180 top
S8  PTS645SM43SMTR92  [PTS645]  34.29,23.11 0 top
S9  PTS645SM43SMTR92  [PTS645]  46.99,23.11 0 top
S10  PTS645SM43SMTR92  [PTS645]  59.69,23.11 0 top
S11  PTS645SM43SMTR92  [PTS645]  72.39,23.11 0 top
S12  PTS645SM43SMTR92  [PTS645]  85.09,23.11 0 top
S13  PTS645SM43SMTR92  [PTS645]  71.12,53.34 180 top
S14  RM106772BCB  [RM-SWITCH]  20.32,40.64 45 top
S15  SIP3240X  [TDFN4]  74.3,136.53 180 top
S16  SIP3240X  [TDFN4]  143.76,134.75 180 top
S17  SIP3240X  [TDFN4]  26.42,92.2 90 top
S18  SIP3240X  [TDFN4]  12.45,94.74 90 top
S19  SN74AHC4066-RGY  [S-PVQFN-N14-3.5MM]  34.29,30.48 180 top
S20  SN74AHC4066-RGY  [S-PVQFN-N14-3.5MM]  46.99,30.48 180 top
S21  SN74AHC4066-RGY  [S-PVQFN-N14-3.5MM]  59.69,30.48 180 top
S22  SN74AHC4066-RGY  [S-PVQFN-N14-3.5MM]  72.39,30.48 180 top
S23  SN74AHC4066-RGY  [S-PVQFN-N14-3.5MM]  85.09,30.48 180 top
S24  TE_SSA12/SPDT  [TE_SSA12/SPDT]  18.8,29.21 180 top
S25  TE_SSA12/SPDT  [TE_SSA12/SPDT]  83.9,57.44 0 top
SJ1  SOLDERJUMPERNO  [SJ_2S-NO]  148.08,68.07 270 top
SJ2  SOLDERJUMPERNC  [SJ_2S]  24.13,150.37 90 top
SJ3  SOLDERJUMPERNC  [SJ_2S]  166.37,150.37 90 top
SJ4  SOLDERJUMPERNC  [SJ_2S]  109.47,79.5 90 top
SJ5  SOLDERJUMPERNC  [SJ_2S]  109.47,84.58 90 top
TP1  TEST_POINT_0.040IN  [TESTPOINT_0.040IN]  50.8,82.3 0 top
TP2  TEST_POINT_0.040IN  [TESTPOINT_0.040IN]  50.8,79.76 0 top
TP3  TEST_POINT_0.040IN  [TESTPOINT_0.040IN]  50.8,77.22 0 top
TP4  TEST_POINT_0.040IN  [TESTPOINT_0.040IN]  21.59,149.1 0 top
TP5  TEST_POINT_0.040IN  [TESTPOINT_0.040IN]  21.59,151.64 0 top
TP6  TEST_POINT_0.040IN  [TESTPOINT_0.040IN]  168.91,149.1 0 top
TP7  TEST_POINT_0.040IN  [TESTPOINT_0.040IN]  168.91,151.64 0 top
TP8  TEST_POINT_0.040IN  [TESTPOINT_0.040IN]  106.43,78.23 0 top
TP9  TEST_POINT_0.040IN  [TESTPOINT_0.040IN]  106.43,80.77 0 top
TP10  TEST_POINT_0.040IN  [TESTPOINT_0.040IN]  106.43,83.31 0 top
TP11  TEST_POINT_0.040IN  [TESTPOINT_0.040IN]  106.43,85.85 0 top
TP12  TEST_POINT_0.040IN  [TESTPOINT_0.040IN]  42.16,58.17 0 top
U1  FT232RQ  [QFN32]  41.15,50.8 180 top
U2  FT232RQ  [QFN32]  38.61,73.41 0 top
U3  FT232RQ  [QFN32]  47.5,71.88 0 top
U4  FT232RQ  [QFN32]  48.26,64.52 270 top
U5  FT232RQ  [QFN32]  48.26,55.12 270 top
U6  FT232RQ  [QFN32]  32,51.82 180 top
U7  FXMA2102  [UMLP-8]  68.07,135.13 0 top
U8  FXMA2102  [UMLP-8]  138.56,134.11 0 top
U9  LTC2941  [DFN-6-2MMX3MM]  29.46,89.41 270 top
U10  LTC2943  [DFN-8]  20.57,87.38 270 top
U11  LTC2943  [DFN-8]  38.1,88.9 270 top
U12  LTC2943  [DFN-8]  46.74,87.88 270 top
U13  LTC4360  [SC70-8]  14.99,90.93 180 top
U14  M24C01WMN  [SOIC-8]  148.84,61.98 0 top
U15  MAX6746  [SOT-23-8]  87.63,47.75 270 top
U16  MAX8887EZK33+T  [SOT-23-5]  28.96,82.3 90 top
U17  MCP23008QFN  [QFN-20-4MM]  69.09,125.22 180 top
U18  MCP23008QFN  [QFN-20-4MM]  138.3,126.62 180 top
U19  MCP23008QFN  [QFN-20-4MM]  80.01,91.95 0 top
U20  NCP301LSN30  [SOT23-5]  27.69,60.71 90 top
U21  NCP301LSN30  [SOT23-5]  76.45,68.58 0 top
U22  PCA9544AQFN-N20  [QFN-N20]  39.12,81.53 270 top
U23  SAM4LC8AA  [QFN-48-7MM]  66.55,74.42 0 top
U24  SN74LVC2T45  [VFSOP-8]  54.99,135.89 0 top
U25  SN74LVC2T45  [VFSOP-8]  125.98,135.38 0 top
U26  SN74LVC2T45  [VFSOP-8]  60.71,135.89 0 top
U27  SN74LVC2T45  [VFSOP-8]  131.83,135.38 0 top
U28  TS3USB30E  [UQFN-10]  86.87,106.17 0 top
U29  TS3USB30E  [UQFN-10]  104.14,106.68 180 top
U30  TS3USB30E  [UQFN-10]  93.47,72.77 90 top
U31  TUSB2077A  [LQFP-48]  83.57,77.98 90 top
U32  TUSB2077A  [LQFP-48]  35.05,62.23 270 top
U$12  [UMICH_SOLID_200MIL]  62.87,35.56 0 top
U$15  [UCB_CAL_200MIL]  54.86,35.56 0 top
U$28  [TERRASWARM_200MIL]  71.63,35.56 0 top
Y1  ABMM  [ABMM]  83.57,66.04 0 top
Y2  ABMM  [ABMM]  30.23,75.18 180 top
Y3  FH1600015  [FHXXX]  60.2,81.79 0 top

## Library data of the parts
C1 C2 = passives; DESCRIPTION: CAP CER 8PF 50V C0G/NP0 0603; DIGIKEY: 490-9670-1-ND; MANUFACTURER: Murata; MPN: GRM1885C1H8R0DA01D
C3-C8 = passives; DESCRIPTION: CAP CER 22PF 50V C0G/NP0 0402; DIGIKEY: 490-5868-1-ND; MANUFACTURER: Murata; MPN: GRM1555C1H220JA01D
C9-C12 = passives; DESCRIPTION: CAP CER 22PF 50V C0G/NP0 0603; DIGIKEY: 1276-1023-1-ND; MANUFACTURER: Samsung; MPN: CL10C220JB8NNNC
C13 = passives; DESCRIPTION: CAP CER 10000PF 50V X7R 0603; DIGIKEY: 490-1512-1-ND; MANUFACTURER: Murata; MPN: GRM188R71H103KA01D
C14-C63 = passives; DESCRIPTION: CAP CER 0.1UF 16V X7R 0603; DIGIKEY: 490-1532-1-ND; MANUFACTURER: Murata; MPN: GRM188R71C104KA01D
C64 = passives; DESCRIPTION: CAP CER 0.47UF 10V X5R 0603; DIGIKEY: 490-1539-1-ND; MANUFACTURER: Murata; MPN: GRM188R61A474KA61D
C65 = passives; DESCRIPTION: CAP CER 0.82UF 6.3V X5R 0603; DIGIKEY: 490-11493-1-ND; MANUFACTURER: Murata; MPN: GRM188R60J824KA01D
C66 C67 = passives; DESCRIPTION: CAP CER 2.2UF 16V 10% X5R 0603; DIGIKEY: 490-3296-1-ND; MANUFACTURER: Murata; MPN: GRM188R61C225KE15D
C68-C72 = passives; DESCRIPTION: CAP CER 4.7UF 6.3V X7R 0603; DIGIKEY: 1276-2087-1-ND; MANUFACTURER: Samsung; MPN: CL10B475KQ8NQNC
C73 = passives; DESCRIPTION: CAP CER 6.8UF 6.3V X5R 0603; DIGIKEY: 445-7490-1-ND; MANUFACTURER: TDK; MPN: C1608X5R0J685K080AB
C74 C75 = passives; DESCRIPTION: CAP CER 150UF 6.3V X5R 1210; DIGIKEY: 1276-3367-1-ND; MANUFACTURER: Samsung; MPN: CL32A157MQVNNNE
D1-D3 = passives; DIGIKEY: RB521ZS8A30TE61CT-ND; MANUFACTURER: Rohm Semiconductor; MPN: RB521ZS8A30TE61
D4-D9 D11 D13 D20 D22 D23 D25 = leds; DESCRIPTION: LED GREEN CLEAR 0603 SMD; DIGIKEY: 160-1446-1-ND; MANUFACTURER: Lite-On; MPN: LTST-C191KGKT
D10 D12 D19 D21 D24 D34 = leds; DESCRIPTION: LED RED CLEAR 0603 SMD; DIGIKEY: 160-1447-1-ND; MANUFACTURER: Lite-On; MPN: LTST-C191KRKT
D14-D18 D26-D33 = leds; DESCRIPTION: LED BLUE CLEAR 0603 SMD; DIGIKEY: 160-1827-1-ND; MANUFACTURER: Lite-On; MPN: LTST-C193TBKT-5A
D35 D36 = signpost; DIGIKEY: 296-6596-1-ND; MANUFACTURER: Texas Instruments; MPN: SN75240PWR
FB1 = passives; DESCRIPTION: FERRITE BEAD 1.5 KOHM 0603 1LN; DIGIKEY: 490-5216-1-ND; MANUFACTURER: Murata; MPN: BLM18HE152SN1D
H1-H8 = holes
J1 = signpost; DIGIKEY: S9197-ND; DIGIKEY2: S9194-ND; DIGIKEY3: S7072-ND; DIGIKEY4: S7072-ND
J2 J3 = signpost; DIGIKEY: S9195-ND; DIGIKEY2: S7072-ND
J4 J5 = connector; DIGIKEY: H11574CT-ND; MOUSER: 798-ZX62R-B-5P; NEWARK: 69W0714
J6 = con-ml; OC_FARNELL: unknown; OC_NEWARK: unknown
J7 = connector; DIGIKEY: CP-102AH-ND
J8 = connector
JP1-JP14 JP16-JP20 = pinhead
JP15 JP21-JP25 = SparkFun-Aesthetics
L1 = signpost; DIGIKEY: 490-5350-1-ND; MANUFACTURER: Murata; MPN: LQH3NPN220MJ0L
Q1-Q7 = fets; DIGIKEY: DMN32D2LDF-7DICT-ND; MANUFACTURER: Diodes Incorporated; MPN: DMN32D2LDF-7
Q8 = fets; DESCRIPTION: MOSFET N-CH 20V 2.6A SOT-23; DIGIKEY: SI2302CDS-T1-E3CT-ND; MANUFACTURER: Vishay Siliconix; MPN: SI2302CDS-T1-E3
R1-R4 = passives; DESCRIPTION: RES SMD 0.017 OHM 1% 1/2W 0805; DIGIKEY: WSLPB-.017CT-ND; MANUFACTURER: Vishay Dale; MPN: WSLP0805R0170FEB
R5-R10 = passives; DESCRIPTION: RES SMD 27 OHM 5% 1/16W 0402; DIGIKEY: 541-27JCT-ND; MANUFACTURER: Vishay Dale; MPN: CRCW040227R0JNED
R11-R17 = passives; DESCRIPTION: RES SMD 49.9 OHM 1% 1/10W 0603; DIGIKEY: RHM49.9BJCT-ND; MANUFACTURER: Rohm; MPN: TRR03EZPF49R9
R18-R26 = passives; DESCRIPTION: RES ARRAY 4 RES 1K OHM 1206; DIGIKEY: Y9102CT-ND; MANUFACTURER: Panasonic; MPN: EXB-38V102JV
R27-R31 = passives; DESCRIPTION: RES SMD 1.5K OHM 5% 1/10W 0603; DIGIKEY: 311-1.5KGRCT-ND; MANUFACTURER: Yageo; MPN: RC0603JR-071K5L
R32-R35 = passives; DESCRIPTION: RES ARRAY 4 RES 1.8K OHM 1206; DIGIKEY: Y9182CT-ND; MANUFACTURER: Panasonic; MPN: EXB-38V182JV
R36-R53 = passives; DESCRIPTION: RES SMD 10K OHM 5% 1/10W 0603; DIGIKEY: P10KGCT-ND; MANUFACTURER: Panasonic; MPN: ERJ-3GEYJ103V
R54-R61 = passives; DESCRIPTION: RES SMD 15K OHM 1% 1/10W 0603; DIGIKEY: RHM15.0KCFCT-ND; MANUFACTURER: Rohm; MPN: MCR03ERTF1502
R62-R64 = passives; DESCRIPTION: RES ARRAY 4 RES 15K OHM 1206; DIGIKEY: Y9153CT-ND; MANUFACTURER: Panasonic; MPN: EXB-38V153JV
R65-R68 = passives; DESCRIPTION: RES SMD 100K OHM 1% 1/16W 0402; DIGIKEY: 1276-3432-1-ND; MANUFACTURER: Samsung; MPN: RC1005F104CS
R69-R78 = passives; DESCRIPTION: RES SMD 1M OHM 5% 1/4W 0603; DIGIKEY: RHM1MDCT-ND; MANUFACTURER: Rohm; MPN: ESR03EZPJ105
R79-R84 = passives; DESCRIPTION: RES SMD 10M OHM 5% 1/4W 0603; DIGIKEY: RHM10MDCT-ND; MANUFACTURER: Rohm; MPN: ESR03EZPJ106
R85 = passives
S1 S2 = signpost; DIGIKEY: AP2401MP-13DICT-ND
S3 S4 = switches; DIGIKEY: 679-1858-ND; MFN: MMS42
S5 S6 = signpost; DIGIKEY: NC7SZ157P6XCT-ND
S7-S13 = switches; DIGIKEY: CKN9112CT-ND
S14 = switches; DIGIKEY: CKN10703-ND
S15-S18 = signpost; DIGIKEY: SIP32402ADNP-T1GE4CT-ND
S19-S23 = switches; DIGIKEY: 296-15258-1-ND
S24 S25 = switches; DIGIKEY: 450-1602-ND
SJ1-SJ5 = SparkFun-Passives
TP1-TP12 = headers; DIGIKEY: 5001K-ND
U1-U6 = ftdichip; MPN: FT232RQ; OC_FARNELL: 1146033; OC_NEWARK: 91K9919
U7 U8 = signpost; DIGIKEY: FXMA2102UMXCT-ND
U9 = chips; DIGIKEY: LTC2941IDCB#TRMPBFCT-ND
U10-U12 = chips; DIGIKEY: LTC2943IDD#PBF-ND
U13 = chips; DIGIKEY: LTC4360CSC8-1#TRMPBFCT-ND
U14 = chips; DIGIKEY: 497-8631-1-ND
U15 = chips
U16 = chips; DIGIKEY: MAX8887EZK33+TCT-ND
U17-U19 = signpost; DIGIKEY: MCP23008-E/ML-ND
U20 U21 = signpost; DIGIKEY: NCP301LSN30T1GOSCT-ND
U22 = signpost; DIGIKEY: 296-20960-1-ND
U23 = chips; DIGIKEY: ATSAM4LC8AA-MU-ND
U24-U27 = signpost; DIGIKEY: 296-17014-1-ND
U28-U30 = signpost; DIGIKEY: 296-24684-1-ND
U31 U32 = signpost; DIGIKEY: 296-37871-1-ND
U$12 U$15 U$28 = logos
Y1 Y2 = crystals; DIGIKEY: 535-10156-1-ND; MANUFACTURER: Abracon LLC; MPN: ABMM-6.000MHZ-B2-T
Y3 = crystals; DIGIKEY: FH1600015CT-ND; MANUFACTURER: Diodes Incorporated; MPN: FH1600015

## Nets
3V3_UNMETERED: C40.1 C41.1 C42.1 C53.2 C54.2 C67.1 C72.2 D10.A D11.A D12.A D13.A D19.A D20.A D21.A D22.A D24.A D25.A D34.A FB1.2 JP11.3 JP16.2 R31.2 R51.2 R52.2 R65.2 R66.2 R67.2 R85.2 S3.B1 S3.B2 S3.B3 S3.B4 S4.B1 S4.B2 S4.B3 S4.B4 S14.C S17.3 S19.14 S20.14 S21.10 S21.14 S22.10 S22.14 S23.10 S23.14 U1.1 U6.1 U15.5 U15.8 U16.5 U20.2 U23.8 U23.27 U23.31 U23.40 U23.45 U30.9 U32.9 U32.10 U32.46 U32.47
3V3_WATCHDOGGED: R1.2 R32.A2 R32.B2 R32.C2 S17.1 U9.1
5V_UNMETERED: C43.1 C46.1 C48.1 C50.1 C52.1 C55.1 C66.1 C71.1 D23.A JP11.1 JP16.1 Q8.2 R48.2 S18.3 U1.19 U2.19 U3.19 U4.19 U5.19 U6.19 U13.7 U16.1
5V_WATCHDOGGED: R2.2 R3.2 R4.2 R33.A2 R33.B2 R33.C2 R34.A2 R34.B2 R34.C2 R35.A2 R35.B2 R35.C2 S18.1 U10.P1 U11.P1 U12.P1
!BACKPLANE_RESET: D3.1A J1.22 JP14.2 R42.1 U17.4 U18.4 U19.4
!POWER_ON_RESET: D2.4A R52.1 U20.1 U32.6
!SMBALERT: J1.6 JP11.10 JP12.6 R45.1 U22.17
!WATCHDOG: J1.7 JP12.7 U15.6
CONT0_!RESET: D1.3A J1.105 JP9.1 S10.3 S10.4 S21.9
CONT0_DBG_GPIO1: J1.101 JP9.5 Q4.G1 R73.2
CONT0_DBG_GPIO2: J1.104 JP9.2 Q4.G2 R74.2
CONT0_DBG_RX: J1.103 JP9.3 U4.30
CONT0_DBG_TX: J1.102 JP9.4 U4.2
CONT0_SWDCLK: J1.106 S21.3
CONT0_SWDIO: J1.107 S21.2
CONT0_VCCIO: C49.1 U4.16
CONT1_!RESET: D1.4A J1.205 JP10.1 S11.3 S11.4 S22.9
CONT1_DBG_GPIO1: J1.201 JP10.5 Q5.G1 R75.2
CONT1_DBG_GPIO2: J1.204 JP10.2 Q5.G2 R76.2
CONT1_DBG_RX: J1.203 JP10.3 U5.30
CONT1_DBG_TX: J1.202 JP10.4 U5.2
CONT1_SWDCLK: J1.206 S22.3
CONT1_SWDIO: J1.207 S22.2
CONT1_VCCIO: C51.1 U5.16
CONT_DBG_PIN1: JP19.1 JP20.1
CONT_DBG_PIN2: JP19.2 JP20.2
CONT_DBG_PIN3: JP19.3 JP20.3
CONT_DBG_PIN4: JP19.4 JP20.4
CONT_DBG_PIN5: JP19.5 JP20.5
CONT_DBG_PIN6: JP19.6 JP20.6
CONT_DBG_PIN7: JP19.7 JP20.7
CONT_DBG_PIN8: JP19.8 JP20.8
CONT_DBG_PIN9: JP19.9 JP20.9
CONT_DBG_PIN10: JP19.10 JP20.10
CONT_DBG_PIN11: JP19.11 JP20.11
CONT_DBG_PIN12: JP19.12 JP20.12
CONT_DBG_PIN13: JP19.13 JP20.13
CONT_DBG_PIN14: JP19.14 JP20.14
CONT_DBG_PIN15: JP19.15 JP20.15
CONT_DBG_PIN16: JP19.16 JP20.16
CONT_DBG_PIN18: JP19.18 JP20.18
CONT_DBG_PIN20: JP19.20 JP20.20
CONT_HDR_BOT_RSV_PIN6: JP14.6
CONT_HDR_BOT_RSV_PIN9: JP13.1
CONT_HDR_BOT_RSV_PIN10: JP13.2
CONT_HDR_TOP_RSV_PIN8: JP12.8
CONT_MOD0_IN: J1.9 JP12.9 U24.2
CONT_MOD0_OUT: J1.10 JP12.10 U26.2
CONT_MOD1_IN: J1.11 JP12.11 U25.2
CONT_MOD1_OUT: J1.12 JP12.12 U27.2
CONT_MOD2_IN: J1.13 JP12.13 U23.39
CONT_MOD2_OUT: J1.14 JP12.14 U23.38
CONT_MOD5_IN: J1.15 JP12.15
CONT_MOD5_OUT: J1.16 JP12.16
CONT_MOD6_IN: J1.17 JP12.17
CONT_MOD6_OUT: J1.18 JP12.18
CONT_MOD7_IN: J1.19 JP12.19
CONT_MOD7_OUT: J1.20 JP12.20
CONT_USB+: J1.27 U30.6
CONT_USB-: J1.28 U30.2
CONTROLLER_BUCK/LDO_N: R49.2 R85.1 U23.3
DBG_USB_!PWRON: TP12.TESTPOINT U32.11
DBG_USB_DM0: J5.2 U32.4
DBG_USB_DM1: U6.15 U32.13
DBG_USB_DM2: U1.15 U32.17
DBG_USB_DM3: U5.15 U32.21
DBG_USB_DM4: U4.15 U32.26
DBG_USB_DM5: R61.1 U32.30
DBG_USB_DM6: U3.15 U32.34
DBG_USB_DM7: U2.15 U32.38
DBG_USB_DP0: J5.3 R29.1 U32.3
DBG_USB_DP1: U6.14 U32.14
DBG_USB_DP2: U1.14 U32.18
DBG_USB_DP3: U5.14 U32.22
DBG_USB_DP4: U4.14 U32.27
DBG_USB_DP5: R60.1 U32.31
DBG_USB_DP6: U3.14 U32.35
DBG_USB_DP7: U2.14 U32.39
DBG_USB_HUBCFG: TP1.TESTPOINT U32.40
DBG_USB_PORTDIS: TP3.TESTPOINT U32.42
DBG_USB_PORTPWR: TP2.TESTPOINT U32.41
DBG_USB_XTAL1: C11.2 U32.45 Y2.3
DBG_USB_XTAL2: R30.2 U32.44
DEBUG_HUB_!OVRCURX: R51.1 U32.12 U32.16 U32.20 U32.25 U32.29 U32.33 U32.37
FAKE_RADIO_XIN: C1.1 U23.1 Y3.3
FAKE_RADIO_XOUT: C2.1 U23.2 Y3.1
FTDI_!RESET: D2.3A U1.18 U2.18 U3.18 U4.18 U5.18 U6.18
GND: C1.2 C2.2 C3.2 C4.2 C5.2 C6.2 C7.2 C8.2 C9.1 C10.1 C11.1 C12.1 C13.2 C14.2 C15.2 C16.2 C17.2 C18.2 C19.2 C20.2 C21.2 C22.2 C23.2 C24.2 C25.2 C26.1 C27.2 C28.2 C29.2 C30.2 C31.2 C32.2 C33.2 C34.2 C35.1 C36.1 C37.2 C38.2 C39.2 C40.2 C41.2 C42.2 C43.2 C44.2 C45.2 C46.2 C47.2 C48.2 C49.2 C50.2 C51.2 C52.2 C53.1 C54.1 C55.2 C56.2 C57.2 C58.2 C59.2 C60.2 C61.2 C62.2 C63.2 C64.2 C65.2 C66.2 C67.2 C68.2 C69.2 C70.1 C71.2 C72.1 C73.2 C74.2 C75.2 D35.1 D35.3 D35.5 D35.7 D36.1 D36.3 D36.5 D36.7 H1.B#4 H2.B#4 H3.B#4 H4.B#4 H5.B#4 H6.B#4 H7.B#4 H8.B#4 J1.1 J1.21 J1.100 J1.200 J1.MNT1 J1.MNT2 J1.MNT3 J1.MNT4 J2.1 J2.14 J2.15 J2.MNT1 J2.MNT2 J2.MNT3 J2.MNT4 J3.1 J3.14 J3.15 J3.MNT1 J3.MNT2 J3.MNT3 J3.MNT4 J4.5 J5.5 J6.4 J6.6 J6.8 J6.10 J6.12 J6.14 J6.16 J6.18 J6.20 J7.2 J8.3 JP1.2 JP1.9 JP2.2 JP2.9 JP3.6 JP4.1 JP5.1 JP6.6 JP9.6 JP10.6 JP11.2 JP11.9 JP12.1 JP14.1 JP16.7 JP16.8 JP19.19 JP20.19 Q1.S Q2.S Q3.S Q4.S Q5.S Q6.S Q7.S R11.2 R12.2 R13.2 R14.2 R18.C1 R18.D1 R19.C1 R19.D1 R20.C1 R20.D1 R21.C1 R21.D1 R22.C1 R22.D1 R23.A1 R23.B1 R23.C1 R24.A1 R24.B1 R24.C1 R25.A2 R25.B2 R25.C2 R25.D2 R26.A2 R26.B2 R26.C2 R26.D2 R49.1 R54.1 R55.1 R56.1 R57.1 R58.1 R59.1 R60.2 R61.2 R62.B2 R62.C2 R63.A2 R63.B2 R63.D2 R64.A2 R64.C2 R64.D2 R68.1 R69.1 R70.1 R71.1 R72.1 R73.1 R74.1 R75.1 R76.1 R77.1 R78.1 R79.1 R80.1 R81.1 R82.1 R83.1 R84.1 S1.1 S1.PAD S2.1 S2.PAD S3.A1 S4.A1 S5.2 S6.2 S7.3 S7.4 S8.1 S8.2 S9.1 S9.2 S10.1 S10.2 S11.1 S11.2 S12.1 S12.2 S13.1 S13.2 S15.2 S15.PAD S16.2 S16.PAD S17.2 S17.PAD S18.2 S18.PAD S19.7 S20.7 S21.7 S22.7 S23.7 S25.1 U1.4 U1.17 U1.20 U1.24 U1.26 U2.4 U2.17 U2.20 U2.24 U2.26 U3.4 U3.17 U3.20 U3.24 U3.26 U4.4 U4.17 U4.20 U4.24 U4.26 U5.4 U5.17 U5.20 U5.24 U5.26 U6.4 U6.17 U6.20 U6.24 U6.26 U7.4 U8.4 U9.2 U10.P2 U10.P3 U10.P7 U10.P$1 U11.P2 U11.P3 U11.P7 U11.P$1 U12.P2 U12.P3 U12.P7 U12.P$1 U13.2 U13.3 U13.4 U13.6 U14.2 U14.3 U14.4 U15.4 U16.2 U17.1 U17.2 U17.3 U17.17 U17.GND U18.1 U18.2 U18.17 U18.GND U19.1 U19.17 U19.GND U20.3 U21.3 U22.1 U22.2 U22.3 U22.10 U23.6 U23.17 U23.30 U23.48 U23.THERMAL U24.4 U25.4 U26.4 U26.5 U27.4 U27.5 U28.4 U28.10 U29.4 U29.10 U30.4 U30.8 U31.5 U31.24 U31.43 U31.48 U32.5 U32.8 U32.24 U32.43 U32.48 Y3.2 Y3.4
HUB_!OVRCUR1: JP8.2 R37.1 S2.5 U31.12
HUB_!OVRCUR2: JP8.4 R36.1 S1.5 U31.16
HUB_!OVRCUR3: JP8.6 R50.1 U31.20
HUB_!OVRCUR4: R62.A1 U31.25
HUB_!OVRCUR5: R62.D1 U31.29
HUB_!OVRCUR6: R63.C1 U31.33
HUB_!OVRCUR7: R64.B1 U31.37
HUB_!PWRON1: JP8.1 S5.1 U19.10 U31.11
HUB_!PWRON2: JP8.3 S6.1 U19.11 U31.15
HUB_!PWRON3: JP8.5 U19.12 U31.19
HUB_!PWRON4: U31.23
HUB_!PWRON5: U31.28
HUB_!PWRON6: U31.32
HUB_!PWRON7: U31.36
HUB_CFG: JP7.1 U31.40
HUB_DM1: C6.1 R9.2 U31.13
HUB_DM2: C4.1 R7.2 U31.17
HUB_DM3: C8.1 R5.2 U31.21
HUB_DM4: R62.B1 U31.26
HUB_DM5: R63.A1 U31.30
HUB_DM6: R63.D1 U31.34
HUB_DM7: R64.C1 U31.38
HUB_DP1: C5.1 R8.2 U31.14
HUB_DP2: C3.1 R6.2 U31.18
HUB_DP3: C7.1 R10.2 U31.22
HUB_DP4: R62.C1 U31.27
HUB_DP5: R63.B1 U31.31
HUB_DP6: R64.A1 U31.35
HUB_DP7: R64.D1 U31.39
HUB_PORTDIS: JP7.4 U31.42
HUB_PORTPWR: JP7.2 U31.41
JTAG_5V: J6.19
JTAG_!RESET: J6.15 S19.8 S20.8 S21.8 S22.8 S23.8 S24.1
JTAG_DBGRQ: J6.17
JTAG_NTRST: J6.3
JTAG_RTCK: J6.11
JTAG_SWDCLK: J6.9 S19.4 S20.4 S21.4 S22.4 S23.4
JTAG_SWDIO: J6.7 S19.1 S20.1 S21.1 S22.1 S23.1 S24.IN
JTAG_SWO/TDO: J6.13
JTAG_TDI: J6.5
JTAG_VTREF: J6.1 S19.11 S20.11 S21.11 S22.11 S23.11
MASTER_!RESET: D1.1K D1.2K D1.3K D1.4K D2.1K D2.2K D2.3K D2.4K D3.1K S7.1 S7.2
MOD0_5V: C16.1 JP1.1 JP4.2 S15.1 SJ2.2 TP5.TESTPOINT
MOD0_5V_HEADER: J2.2 SJ2.1 TP4.TESTPOINT
MOD0_5V_METERED: C33.1 C60.1 C68.1 JP16.5 R3.1 S1.2 S1.3 S15.3 U11.P8
MOD0_D+_HUB-SW: D36.4 R6.1 R54.2 U28.3
MOD0_D-_HUB-SW: D36.2 R7.1 R55.2 U28.5
MOD0_DBG_!RESET: D1.1A J2.20 JP3.1 S8.3 S8.4 S19.9
MOD0_DBG_GPIO1: J2.16 JP3.5 Q2.G1 R69.2
MOD0_DBG_GPIO2: J2.19 JP3.2 Q2.G2 R70.2
MOD0_DBG_RX: J2.18 JP3.3 U2.30
MOD0_DBG_SWDCLK: J2.21 S19.3
MOD0_DBG_SWDIO: J2.22 S19.2
MOD0_DBG_TX: J2.17 JP3.4 U2.2
MOD0_HDR_RSV_PIN3: JP4.3
MOD0_HDR_RSV_PIN9: JP4.9
MOD0_IN: J2.10 JP1.7 JP4.10 U24.7
MOD0_ISO_I2C: D5.A JP17.2 S3.COM3 U7.5
MOD0_ISO_OVERRIDE: D26.A D27.A D28.A D29.A S3.COM1
MOD0_ISO_P0: R79.2 S3.A4 U17.9
MOD0_ISO_P1: R80.2 S3.A3 U17.10
MOD0_ISO_P2: R81.2 S3.A2 U17.11
MOD0_ISO_POWER: D4.A JP17.3 S3.COM4 S15.4
MOD0_ISO_USB: D6.A JP17.1 S3.COM2 S6.6
MOD0_OUT: J2.8 JP1.8 JP4.8 U26.7
MOD0_PPS: J2.7 JP1.10 JP4.7 U24.6
MOD0_SCL: J2.5 JP1.5 JP4.5 R39.2 U7.6
MOD0_SDA: J2.6 JP1.6 JP4.6 R38.2 U7.7
MOD0_USB+: J2.11 U28.1
MOD0_USB-: J2.12 U28.7
MOD0_USB_!EN: S1.4 S6.4 U28.8
MOD0_USB_VBUS: C29.1 C74.1 J2.13 JP1.3 S1.6 S1.7
MOD0_VCCIO: C22.1 C24.1 C37.1 J2.4 JP1.4 JP4.4 R38.1 R39.1 S19.10 U2.1 U7.8 U24.8 U26.8
MOD1_5V: C17.1 JP2.1 JP5.2 S16.1 SJ3.2 TP7.TESTPOINT
MOD1_5V_HEADER: J3.2 SJ3.1 TP6.TESTPOINT
MOD1_5V_METERED: C34.1 C61.1 C69.1 JP16.6 R4.1 S2.2 S2.3 S16.3 U12.P8
MOD1_D+_HUB-SW: D36.8 R8.1 R56.2 U29.3
MOD1_D-_HUB-SW: D36.6 R9.1 R57.2 U29.5
MOD1_DBG_!RESET: D1.2A J3.20 JP6.1 S9.3 S9.4 S20.9
MOD1_DBG_GPIO1: J3.16 JP6.5 Q3.G1 R71.2
MOD1_DBG_GPIO2: J3.19 JP6.2 Q3.G2 R72.2
MOD1_DBG_RX: J3.18 JP6.3 U3.30
MOD1_DBG_SWDCLK: J3.21 S20.3
MOD1_DBG_SWDIO: J3.22 S20.2
MOD1_DBG_TX: J3.17 JP6.4 U3.2
MOD1_HDR_RSV_PIN3: JP5.3
MOD1_HDR_RSV_PIN9: JP5.9
MOD1_IN: J3.10 JP2.7 JP5.10 U25.7
MOD1_ISO_I2C: D8.A JP18.2 S4.COM3 U8.5
MOD1_ISO_OVERRIDE: D30.A D31.A D32.A D33.A S4.COM1
MOD1_ISO_P0: R82.2 S4.A4 U18.9
MOD1_ISO_P1: R83.2 S4.A3 U18.10
MOD1_ISO_P2: R84.2 S4.A2 U18.11
MOD1_ISO_POWER: D7.A JP18.3 S4.COM4 S16.4
MOD1_ISO_USB: D9.A JP18.1 S4.COM2 S5.6
MOD1_OUT: J3.8 JP2.8 JP5.8 U27.7
MOD1_PPS: J3.7 JP2.10 JP5.7 U25.6
MOD1_SCL: J3.5 JP2.5 JP5.5 R41.2 U8.6
MOD1_SDA: J3.6 JP2.6 JP5.6 R40.2 U8.7
MOD1_USB+: J3.11 U29.1
MOD1_USB-: J3.12 U29.7
MOD1_USB_!EN: S2.4 S5.4 U29.8
MOD1_USB_VBUS: C30.1 C75.1 J3.13 JP2.3 S2.6 S2.7
MOD1_VCCIO: C23.1 C25.1 C38.1 J3.4 JP2.4 JP5.4 R40.1 R41.1 S20.10 U3.1 U8.8 U25.8 U27.8
MOD2_DBG_GPIO1: Q6.G1 R77.2 U23.41
MOD2_DBG_GPIO2: Q6.G2 R78.2 U23.42
MOD2_USB+: D35.6 R10.1 R58.2 U23.47
MOD2_USB-: D35.8 R5.1 R59.2 U23.46
MOD_SCL: J1.24 JP11.5 JP14.4 R47.1 U7.3 U8.3 U23.44
MOD_SDA: J1.23 JP11.6 JP14.3 R46.1 U7.2 U8.2 U23.43
MOD_USB_OVERRIDE_5V: J4.1 Q1.G2 R68.2
MOD_USB_OVERRIDE_DM: J4.2 U30.1
MOD_USB_OVERRIDE_DP: J4.3 U30.7
N$1: D4.C R23.A2
N$2: D5.C R23.B2
N$3: D6.C R23.C2
N$4: R48.1 U16.3
N$5: D10.C R18.A2
N$6: D11.C R18.B2
N$7: C13.1 U16.4
N$8: Q2.D1 R18.A1
N$9: Q2.D2 R18.B1
N$10: D7.C R24.C2
N$11: D9.C R24.A2
N$12: R27.2 U31.2
N$13: D8.C R24.B2
N$14: C10.2 R28.1 Y1.1
N$15: D12.C R19.A2
N$16: D13.C R19.B2
N$17: R11.1 U28.2
N$18: Q3.D1 R19.A1
N$19: Q3.D2 R19.B1
N$20: Q4.D1 R20.A1
N$21: C56.1 U6.16
N$22: Q4.D2 R20.B1
N$23: D21.C R21.A2
N$24: D22.C R21.B2
N$26: R14.1 U29.6
N$27: R13.1 U29.2
N$28: D14.C R18.D2
N$29: Q5.D1 R21.A1
N$30: Q5.D2 R21.B1
N$31: R12.1 U28.6
N$32: D15.C R19.D2
N$33: Q1.D2 R67.1 U30.10
N$34: C45.1 U2.16
N$35: D16.C R20.D2
N$36: D17.C R21.D2
N$38: C39.1 FB1.1 U23.19
N$40: U23.28 U23.29
N$41: U23.25 U23.26
N$42: D18.C R22.D2
N$43: R32.B1 U9.4 U22.5
N$45: SJ1.2 U14.7
N$46: D24.C R22.A2
N$47: R32.A1 U9.3 U22.6
N$48: D25.C R22.B2
N$49: C44.1 U1.16
N$51: C47.1 U3.16
N$52: R34.B1 U11.P5 U22.12
N$53: R34.A1 U11.P4 U22.13
N$54: R34.C1 U11.P6 U22.11
N$55: R35.B1 U12.P5 U22.15
N$56: R35.A1 U12.P4 U22.16
N$57: R35.C1 U12.P6 U22.14
N$58: Q6.D1 R22.A1
N$59: Q6.D2 R22.B1
N$60: D29.C R25.D1
N$61: D28.C R25.C1
N$62: D27.C R25.B1
N$63: D26.C R25.A1
N$65: C65.1 U15.3
N$66: D30.C R26.A1
N$67: R32.C1 U9.5 U22.4
N$68: R33.B1 U10.P5 U22.8
N$69: D19.C R20.A2
N$70: R33.A1 U10.P4 U22.9
N$71: R33.C1 U10.P6 U22.7
N$72: D20.C R20.B2
N$73: C9.2 U31.45 Y1.3
N$74: R28.2 U31.44
N$75: D31.C R26.B1
N$76: D32.C R26.C1
N$77: D33.C R26.D1
N$78: Q7.D1 Q7.G2 R31.1
N$79: S13.3 S13.4 U15.1
N$80: D34.C R16.2
N$82: Q7.D2 R16.1
N$83: R17.1 U13.5
N$84: R15.1 R17.2
N$85: D23.C R15.2
N$86: R29.2 U32.2
N$89: C12.2 R30.1 Y2.1
OVERVOLT_PROT_CTL: Q8.1 U13.8
PPS: J1.25 JP11.4 JP14.5 U23.37 U24.3 U25.3
PROG0_EN: D14.A R18.C2 S14.1 S19.5 S19.6 S19.12 S19.13
PROG1_EN: D15.A R19.C2 S14.2 S20.5 S20.6 S20.12 S20.13
PROG2_EN: D16.A R20.C2 S14.3 S21.5 S21.6 S21.12 S21.13
PROG3_EN: D17.A R21.C2 S14.4 S22.5 S22.6 S22.12 S22.13
PROG4_EN: D18.A R22.C2 S14.5 S23.5 S23.6 S23.12 S23.13
RADIO_!RESET: D2.1A S12.3 S12.4 S23.9 U23.4
RADIO_DEBUG_RX: U6.30 U23.34
RADIO_DEBUG_TX: U6.2 U23.35
RADIO_SWDCLK: R66.1 S23.3 U23.9
RADIO_SWDIO: R65.1 S23.2 U23.10
RADIO_UPLINK_RX: U1.30 U23.23
RADIO_UPLINK_TX: U1.2 U23.24
RADIO_VDDCORE: C63.1 C73.1 L1.P$2 U23.5
RADIO_VDDOUT: L1.P$1 U23.7
SMBCLK: J1.5 J8.1 JP11.7 JP12.5 R44.1 U14.6 U17.19 U18.19 U19.19 U22.18
SMBDATA: J1.3 J8.5 JP11.8 JP12.3 R43.1 U14.5 U17.20 U18.20 U19.20 U22.19
USB+: R27.1 U30.5 U31.3
USB-: U30.3 U31.4
USB_!RESET: D2.2A JP7.5 R53.1 U19.9 U21.1 U31.6
USB_SUSPEND_STATUS: JP7.3 U31.1
VCC_BACKPLANE: C14.1 C15.1 C18.1 C19.1 C20.1 C21.1 C26.2 C27.1 C28.1 C31.1 C32.1 C35.2 C36.2 C57.1 C58.1 C62.1 C70.2 J8.6 JP12.2 JP16.3 R1.1 R36.2 R37.2 R42.2 R43.2 R44.2 R45.2 R46.2 R47.2 R50.2 R53.2 R62.A2 R62.D2 R63.C2 R64.B2 S5.3 S5.5 S6.3 S6.5 SJ1.1 SJ4.2 TP9.TESTPOINT U4.1 U5.1 U7.1 U8.1 U9.6 U14.1 U14.8 U17.18 U18.3 U18.18 U19.2 U19.3 U19.18 U21.2 U22.20 U24.1 U24.5 U25.1 U25.5 U26.1 U27.1 U28.9 U29.9 U31.8 U31.9 U31.10 U31.46 U31.47
VCC_BARRELJACK: J7.1 Q8.3 U13.1
VCC_CONTROLLER_HEADER: J1.2 SJ4.1 TP8.TESTPOINT
VCC_LINUX: C59.1 JP12.4 JP16.4 JP19.17 JP20.17 R2.1 SJ5.2 TP11.TESTPOINT U10.P8
VCC_LINUX_HEADER: J1.4 SJ5.1 TP10.TESTPOINT
WATCHDOG_!RESET: Q7.G1 S17.4 S18.4 U15.7
WDT_CTRL: S25.IN U15.2
WDT_ON: C64.1 S25.2

## Tracks (layer width: path | path; a pad name or v marks a point on that pad's centre or on a via)
3V3_UNMETERED  (via drill 0.3, 0.41)
  Top 0.203: U23.31 | 70.08,72.64 U23.27
  Top 0.254: 16.51,44.45 16.76,44.2 16.76,36.07 v20.83,32 | C72.2 C54.2 32.4,67.42 | U20.2 27.18,60.71 27.43,60.45 27.43,57.55 R52.2 | v29.72,27.18 v29.72,32 | U32.10 30.2,60.48 29.97,60.71 30.25,60.98 U32.9 | 32.4,67.42 32.8,67.02 U32.47 | 32.4,67.42 32.91,67.42 33.3,67.03 U32.46 33.3,65.81 33.27,65.79 | U32.47 32.79,65.81 | v34.54,49.02 34.3,49.26 U6.1 | v36.58,28.45 36.02,29.01 S19.14 | v43.69,48.01 43.45,48.25 U1.1 | v49.02,28.25 48.72,28.55 S20.14 | R85.2 53.85,81.03 56.9,84.07 64.01,84.07 | v59.25,27.94 59.19,28 S21.10 | v61.72,66.29 60.96,67.06 60.2,67.06 59.8,67.45 R66.2 59.69,68.07 58.67,69.09 58.67,70.36 59.83,71.52 C40.1 60.45,72.39 61.73,73.67 U23.8 | v61.72,28.45 61.41,28.75 S21.14 | R65.2 64.52,68.07 v65.28,67.31 v65.28,66.29 | U23.40 67.8,79 v68.31,79.52 | v68.07,67.56 67.96,67.68 FB1.2 67.96,69.74 v68.07,69.85 | v70.1,70.87 70.61,70.87 71.37,71.63 71.37,72.67 | 70.87,74.67 U23.31 | 70.87,74.67 71.89,74.67 72.25,74.31 C41.1 72.25,73.01 71.91,72.67 71.37,72.67 | 70.87,74.67 70.87,74.68 v70.87,75.43 | 71.37,72.67 U23.27 | v71.17,79.5 71.37,79.7 C42.1 | v71.95,27.94 71.89,28 S22.10 | v74.42,28.45 74.11,28.75 S22.14 | v87.12,52.58 82.8,52.58 D34.A 81.78,53.86 81.28,54.36 79.76,54.36 78.6,53.2 R31.2 | v84.65,27.94 84.59,28 S23.10 | v87.12,28.45 86.81,28.75 S23.14 | U15.5 90.13,46.78 90.17,46.74 | U15.8 89.82,48.73 v89.86,48.77 | C53.2 93.47,70.63 U30.9
  Top 0.381: S17.3 25.15,92.45 24.89,92.71
  Top 0.508: 9.14,15.75 0.76,24.13 0.76,59.18 | 12.95,59.18 12.95,48.01 16.51,44.45 S14.C | v24.13,96.01 16,96.01 3.3,108.71 3.3,162.05 22.86,181.61 JP16.2 | v164.59,104.65 164.59,107.95 165.59,108.95 S4.B1 | JP11.3 167.89,83.82 v167.89,92.96 v167.89,101.09 | S4.B4 S4.B3 | S14.C | v52.83,94.49 v52.83,92.71 | C42.1 71.99,80.38 72.39,80.77 72.39,82.04 | D22.A v74.42,3.05 | v87.12,3.05 D25.A | C53.2 94.19,70.12 94.94,69.37 95.2,69.37 v95.25,69.32 | R67.2 94.11,66.67 v94.23,66.8 | v29.97,95.25 29.21,96.01 v24.13,96.01 | v24.13,96.01 24.13,93.47 24.89,92.71
  Bottom 0.254: v29.72,32 v20.83,32 | v29.97,55.37 29.97,53.85 30.48,53.34 31.5,53.34 32,53.85 v32,55.12 | 34.54,47.24 v34.04,46.74 | 34.54,47.24 v34.54,49.02 34.54,49.78 v35.56,50.8 35.81,51.05 35.81,51.82 v35.31,52.32 | 34.54,47.24 36.83,47.24 v37.08,47.5 | v36.58,28.45 37.85,27.18 | 37.85,27.18 v29.72,27.18 | v43.69,48.01 v46.23,48.01 44.96,49.28 v44.96,50.29 | 37.85,27.18 48.01,27.18 49.02,28.19 v49.02,28.25 49.33,27.94 v59.25,27.94 61.21,27.94 v61.72,28.45 62.23,27.94 v71.95,27.94 73.91,27.94 v74.42,28.45 74.93,27.94 v84.65,27.94 86.61,27.94 v87.12,28.45 | v61.72,66.29 v65.28,66.29 | v65.28,67.31 67.82,67.31 v68.07,67.56 | v68.07,69.85 69.09,69.85 v70.1,70.87 | 71.16,79.52 v71.17,79.5 71.17,75.73 v70.87,75.43 | v87.12,52.58 90.93,52.58 v91.44,52.07 | v89.86,48.77 91.44,48.77
  Bottom 0.508: v164.59,104.65 164.69,104.65 S4.B3 167.89,101.45 v167.89,101.09 | v167.89,92.96 143.51,92.96 143,93.47 69.6,93.47 67.06,90.93 64.52,90.93 | S4.B2 S4.B1 | S3.B2 S3.B1 20.32,107.66 20.32,103.89 21.26,102.95 S3.B3 S3.B4 24.13,102.93 v24.13,96.01 | v25.65,12.7 26.16,12.19 27.69,12.19 v28.19,12.7 | v33.78,55.37 35.94,55.37 v36.58,56.01 | v34.8,75.18 35.81,75.18 37.34,76.71 v38.61,76.71 | v35.05,71.12 35.05,69.6 36.07,68.58 v36.07,65.28 | v52.83,94.49 41.91,94.49 41.15,95.25 v29.97,95.25 29.97,94.23 27.94,92.2 27.94,87.88 v27.69,87.63 | v47.24,4.32 v44.7,4.32 | v52.83,92.71 62.74,92.71 64.52,90.93 | v60.2,4.32 v57.66,4.32 | v63.99,84.09 65.26,84.09 v66.03,83.33 | v64.76,87.14 64.52,87.38 64.52,90.93 | v68.57,82.56 67.82,81.82 67.82,80.01 v68.31,79.52 68.33,79.5 v71.17,79.5 | v72.9,4.32 v70.36,4.32 | v74.42,3.05 v87.12,3.05 | v87.88,12.95 v90.93,12.95 | v91.44,47.24 91.44,48.77 v91.44,52.07 | v94.23,66.8 95.25,67.82 v95.25,69.32
  pour Top (isolate 0.127, rank 2): 0,58.42 25.4,58.42 25.4,49.53 arc-90 34.29,40.64 35.56,40.64 35.56,45.72 52.07,45.72 52.07,73.15 48.01,77.72 25.4,77.72 25.4,73.66 0,73.66
  pour Top (isolate 0.254, rank 2): 28.19,88.14 27.43,88.14 25.4,86.11 25.4,77.72 28.19,77.72
  pour Top (isolate 0.127, rank 2): 2.54,16.26 87.88,16.26 90.42,18.8 90.42,28.45 89.66,29.21 89.66,46.99 90.93,48.26 90.93,66.29 95.5,66.29 95.5,48.26 97.03,46.99 97.03,26.92 95.76,25.65 95.76,17.02 91.19,12.45 2.54,12.45
  pour Top (isolate 0.127): 67.56,77.22 74.17,83.06 78.49,83.06 80.01,81.53 83.82,81.53 83.82,83.57 78.23,89.15 66.29,89.15 63.5,86.36 63.5,77.22
  pour Top (isolate 0.254, rank 2): 27.94,0 27.94,15.24 91.44,15.24 91.44,0
3V3_WATCHDOGGED  (via drill 0.3)
  Top 0.254: R32.B2 34.78,87.99 34.92,88.14 34.92,88.9 | R32.C2 34.82,88.79 34.92,88.9 | 34.92,89.79 34.92,88.9
  Top 0.381: U9.1 28.04,90.58 27.94,90.68
  Bottom 0.508: v29.21,86.61 v29.21,90.68
  pour Top (isolate 0.127, rank 2): 26.67,92.96 26.67,90.42 28.7,88.65 28.7,86.36 35.31,86.36 35.31,93.47 27.18,93.47
5V_UNMETERED  (via drill 0.3)